# Altium PCB Trackpad.PcbDoc (part 1 of 3)
Units mm, origin at the board's own origin, x right, y up, seen from the top; angles counter-clockwise.
Board outline 170 x 125 mm, 6 copper layers (Top Layer, Inner 1, Inner 2, Inner 3, Inner 4, Bottom Layer), stack 1.58 mm thick; 124 components, 120 nets, 488 pads, 1566 vias.
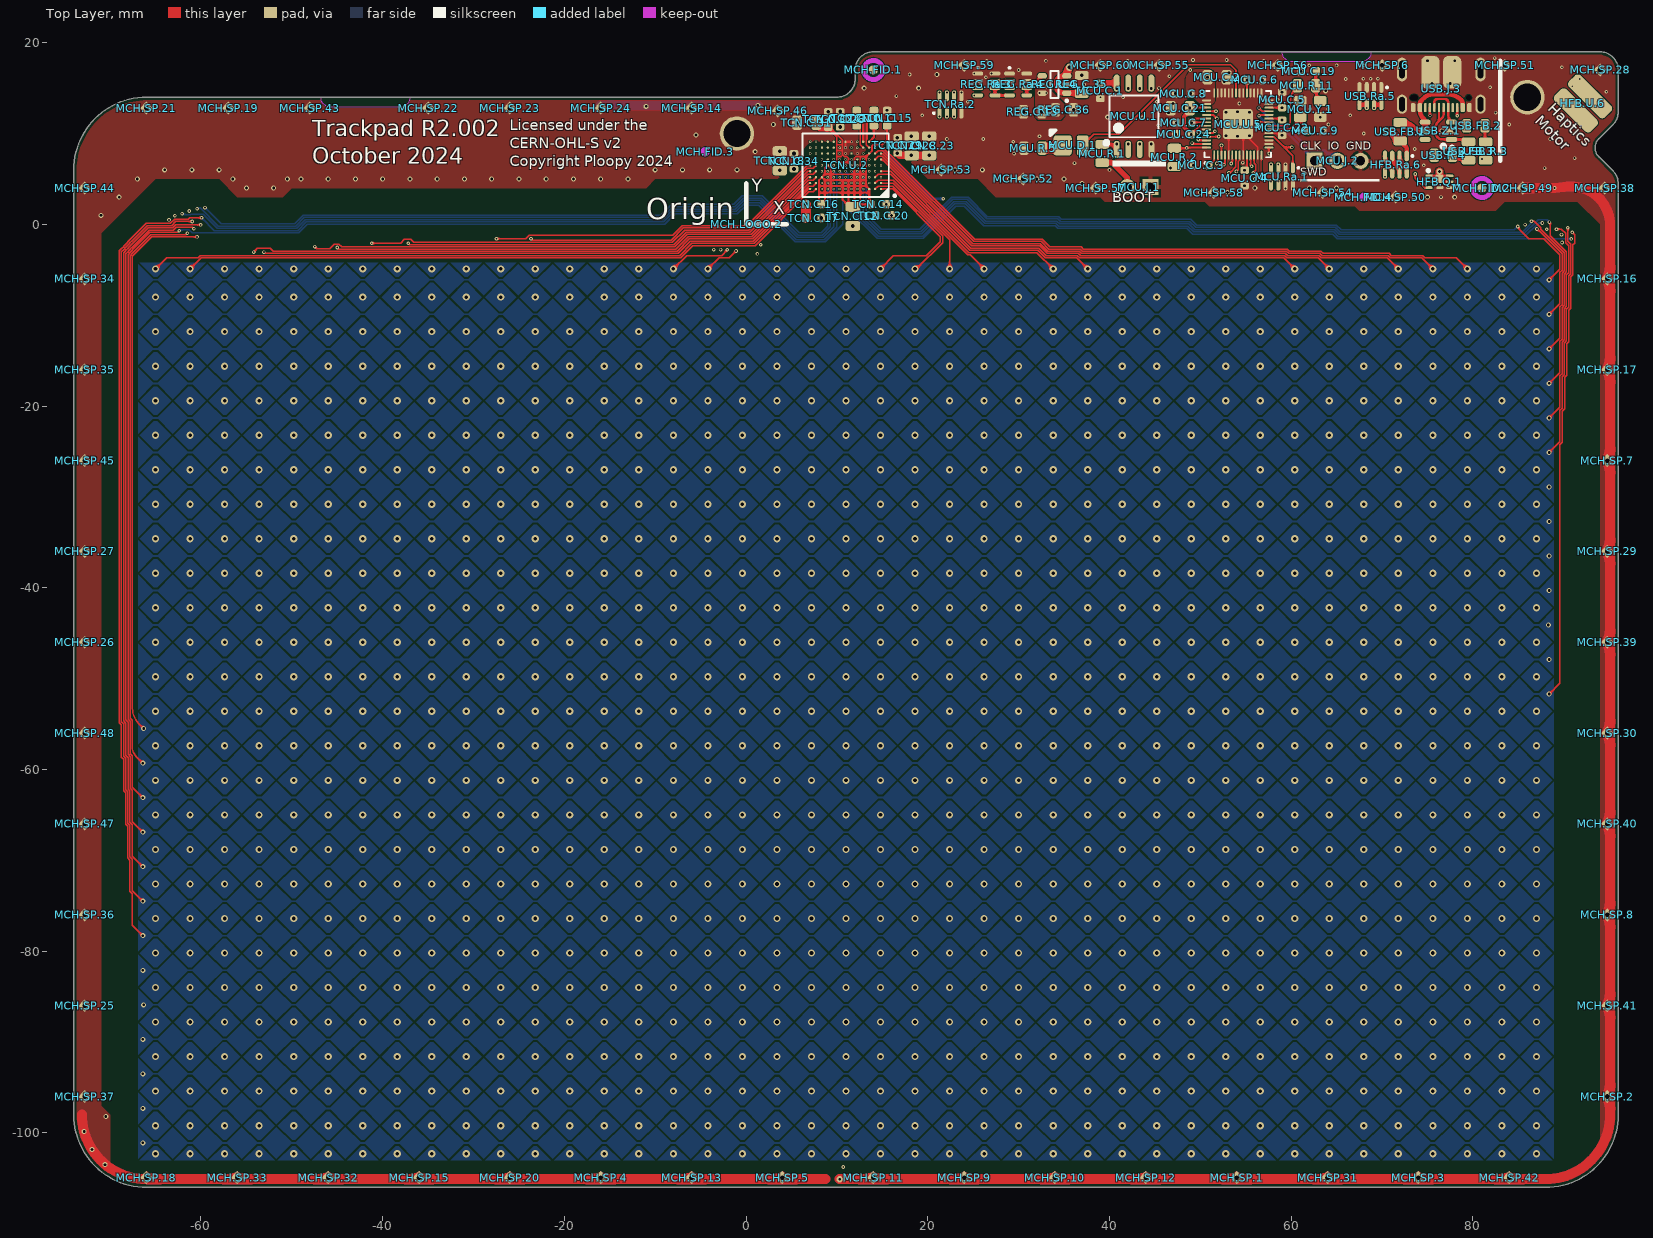
[diagram p0: Top Layer view]
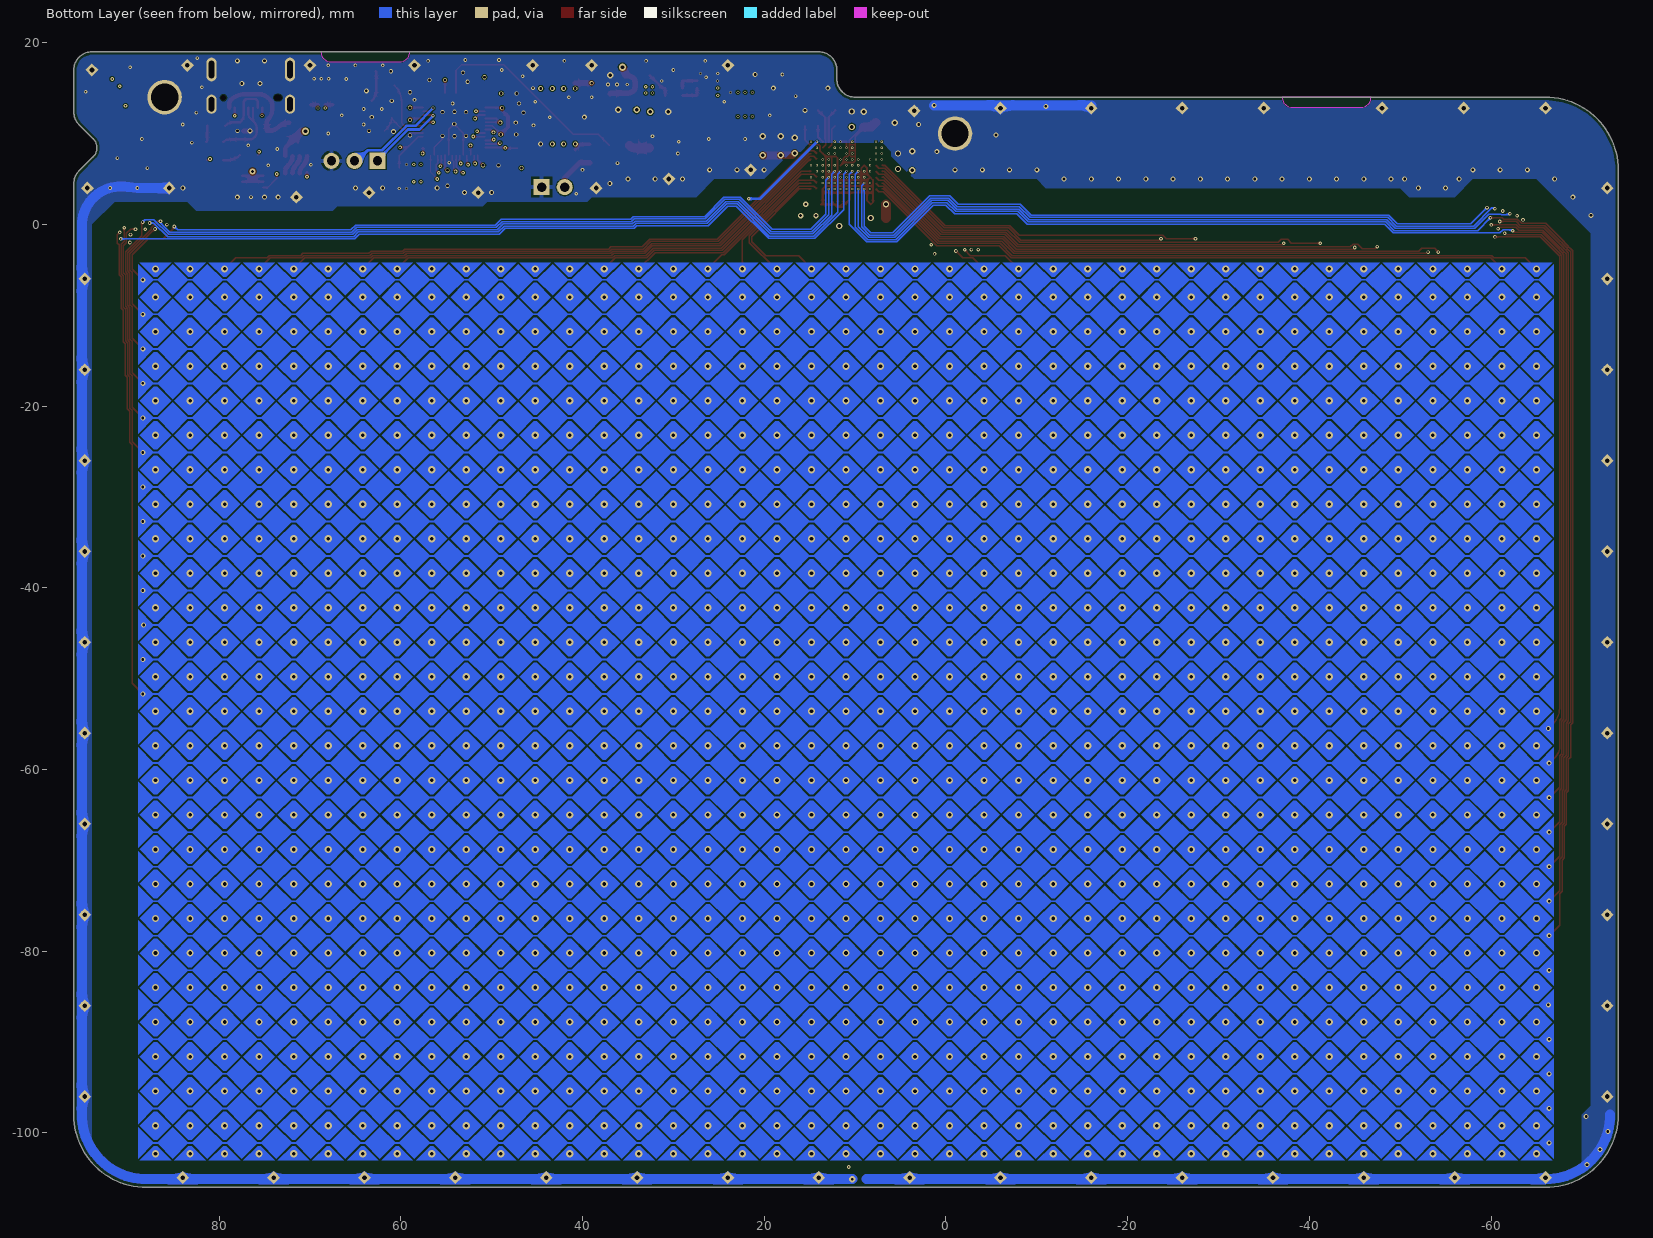
[diagram p1: Bottom Layer view, seen from below]
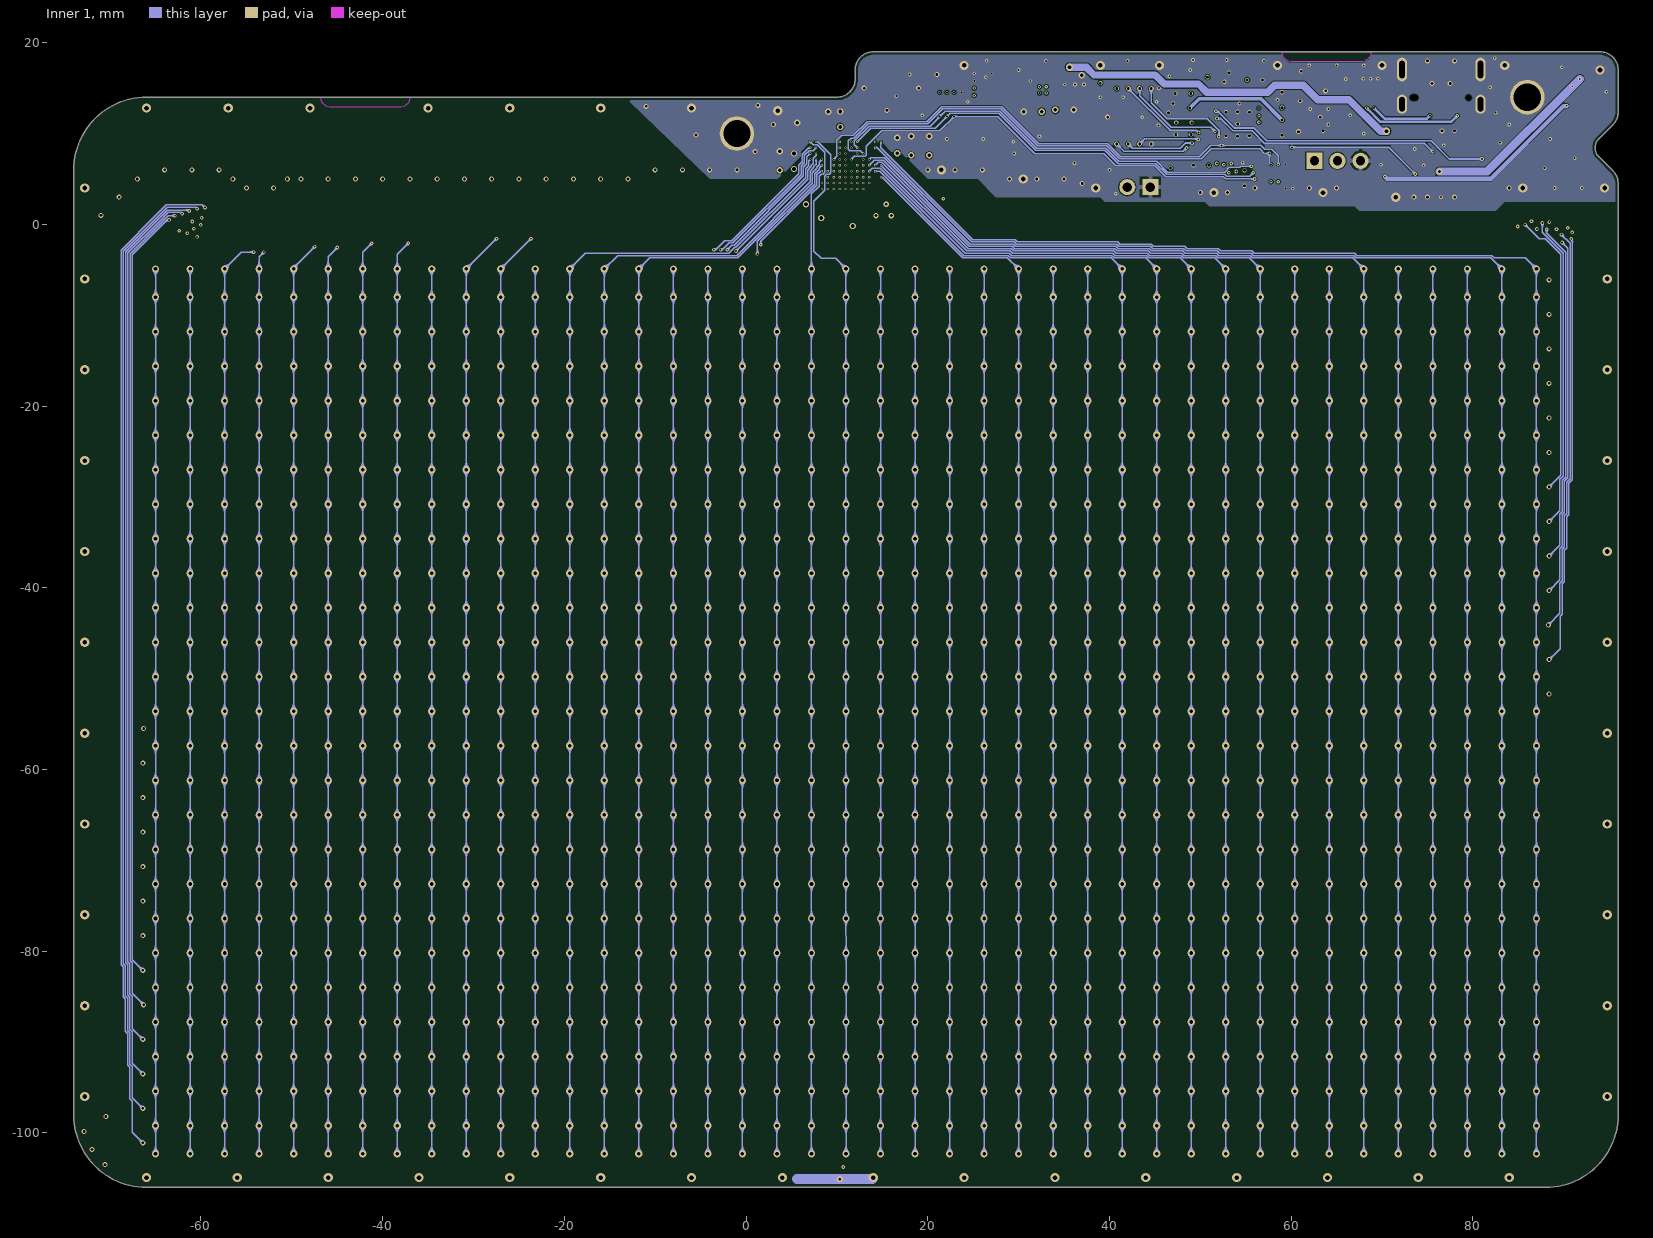
[diagram p2: Inner 1]
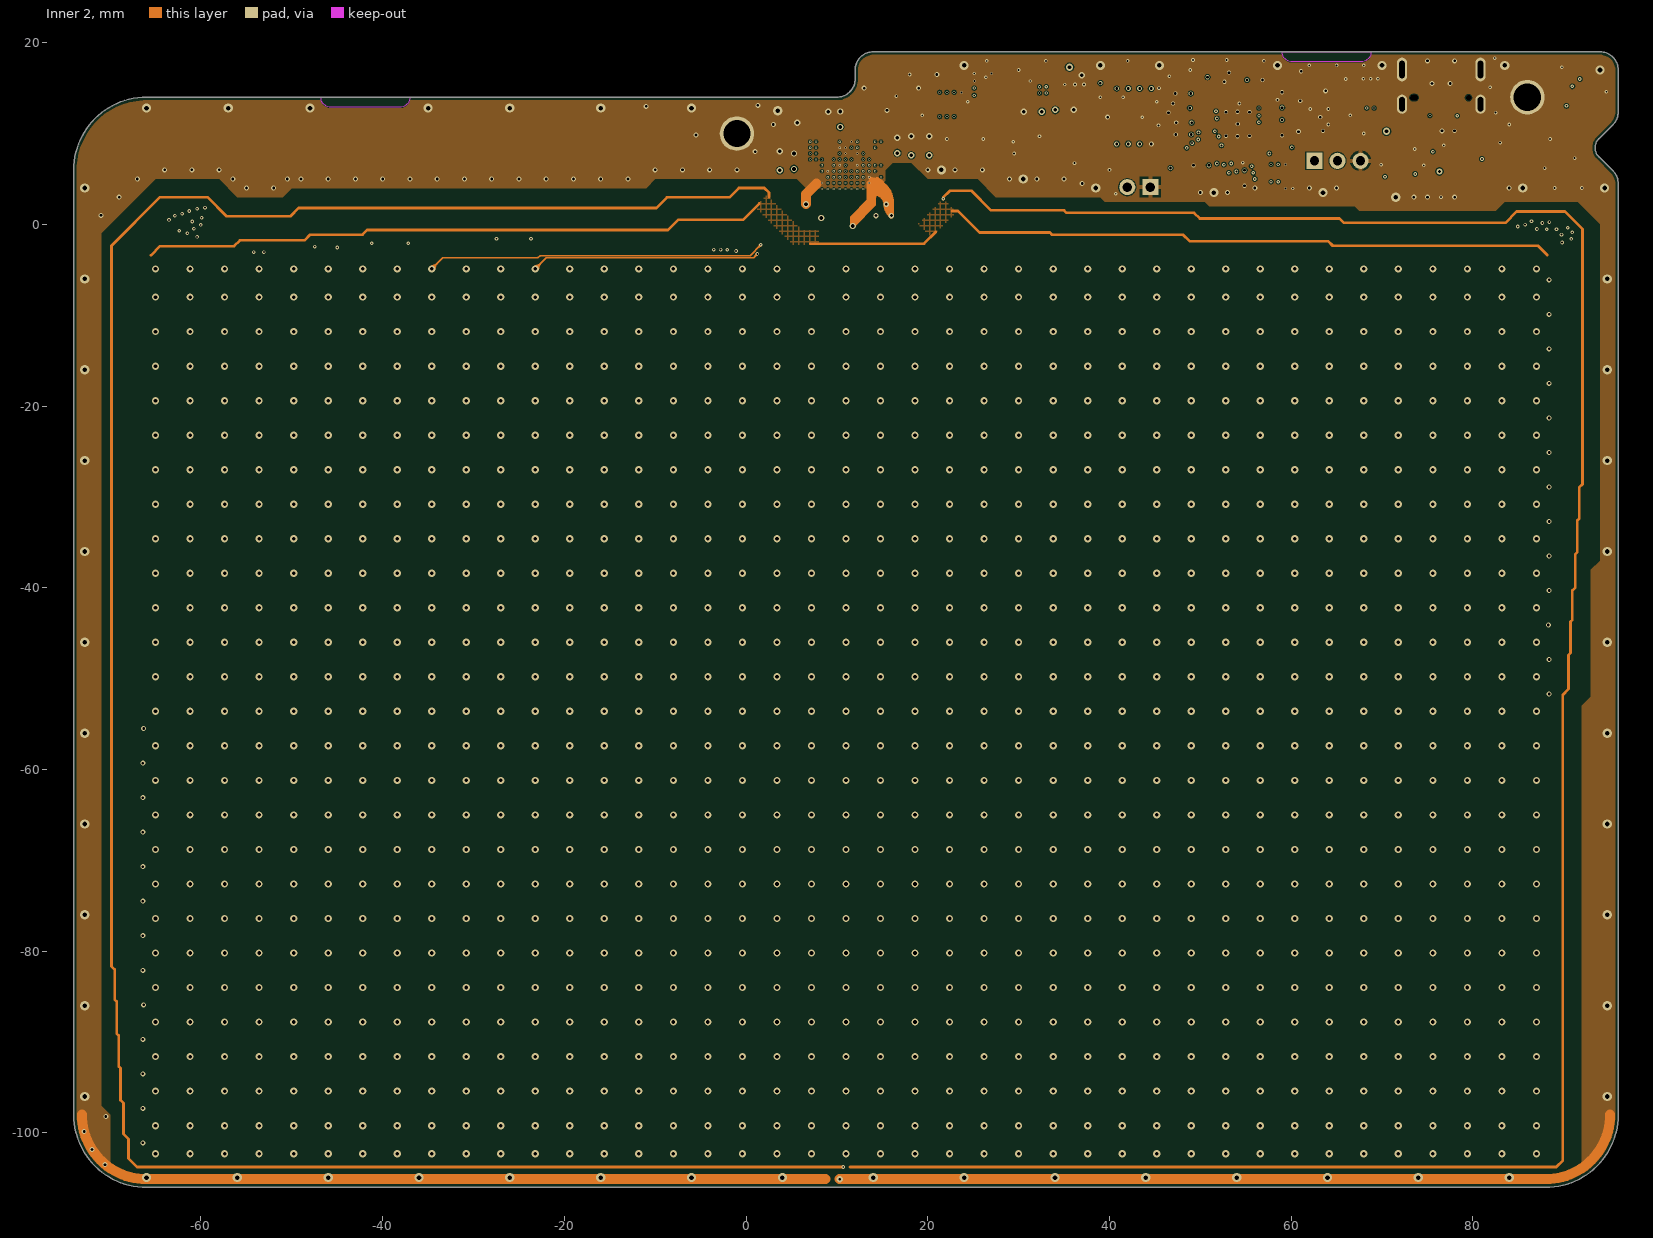
[diagram p3: Inner 2]
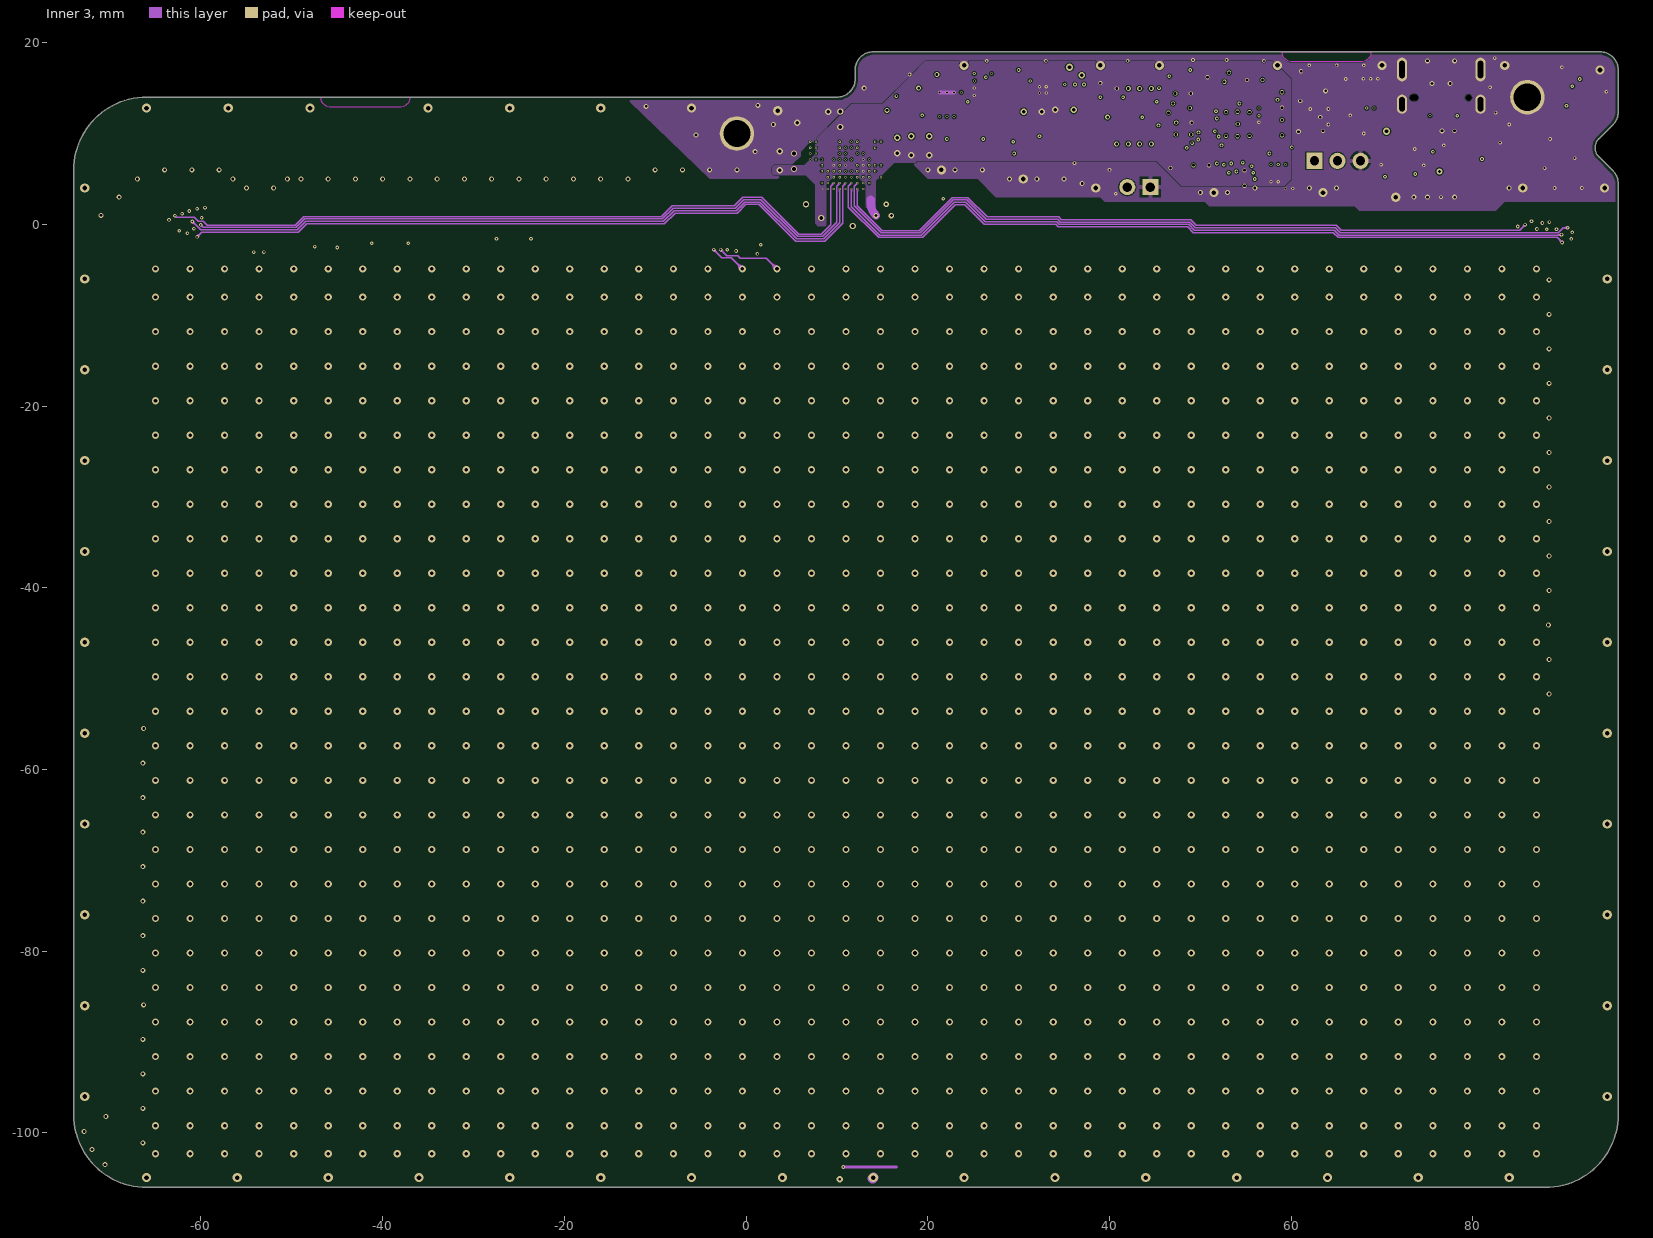
[diagram p4: Inner 3]
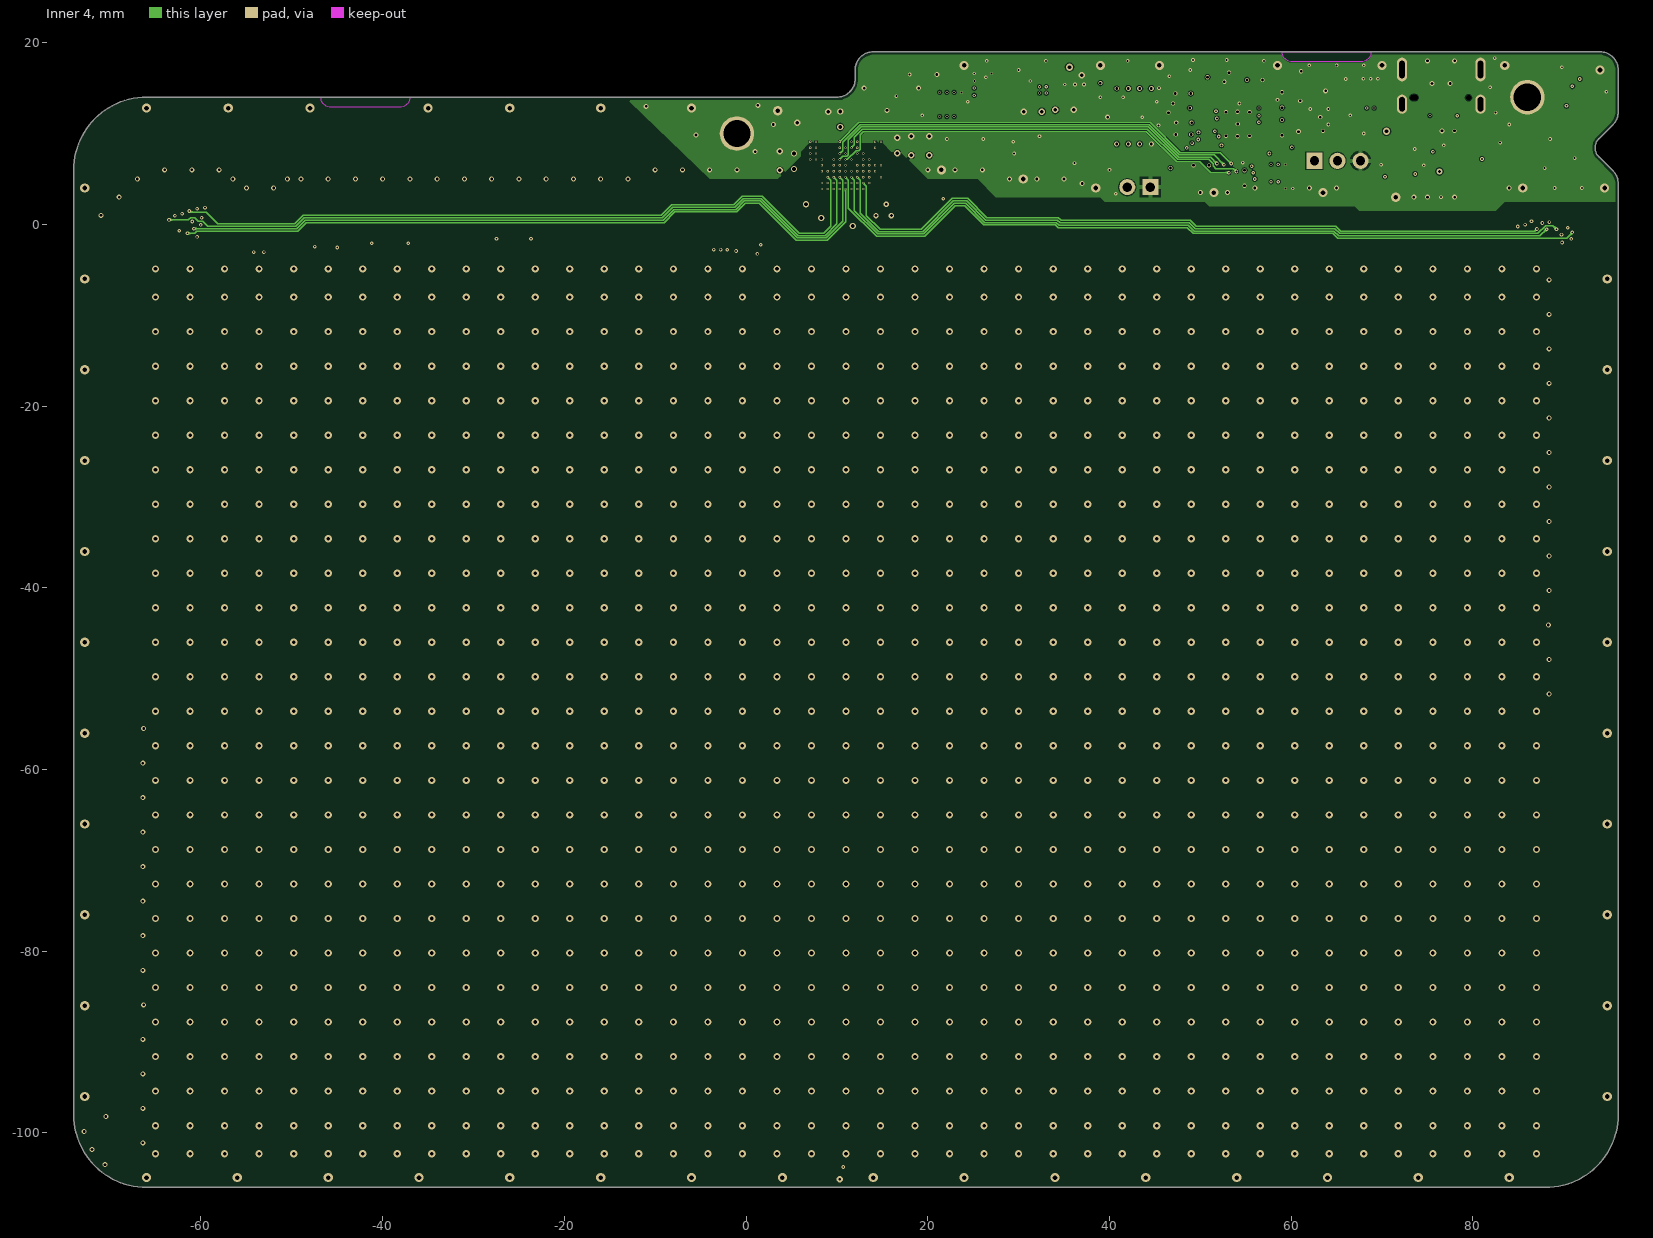
[diagram p5: Inner 4]

## Layer stack, top to bottom
Top Mask: solder mask 0.01, Solder Resist, Dk 3.5
Top Layer: signal copper 0.036
Dielectric 1: prepreg 0.2, FR-4, Dk 4.2
Inner 1: signal copper 0.0175
Dielectric 3: prepreg 0.2, PP-006, Dk 4.1
Inner 2: signal copper 0.0175
Dielectric 4: core 0.638, Dk 4.2
Inner 3: signal copper 0.0175
Dielectric 5: prepreg 0.2, PP-006, Dk 4.1
Inner 4: signal copper 0.0175
Dielectric 2: prepreg 0.2, Dk 4.2
Bottom Layer: signal copper 0.036
Bottom Solder: solder mask 0.01, Solder Resist, Dk 3.5

## Board outline
-74,-98 ccw(c-66,-98) -66,-106 88,-106 ccw(c88,-98) 96,-98 96,4.485 ccw(c94,4.485) 95.414,5.899 93.869,7.444 cw(c94.859,8.434) 93.869,9.424 95.414,10.969 ccw(c94,12.384) 96,12.384 96,17 ccw(c94,17) 94,19 14,19 ccw(c14,17) 12,17 12,16 cw(c10,16) 10,14 -66,14 ccw(c-66,6) -74,6

## Design rules (kind name [scope] priority, off if disabled: settings)
BoardOutlineClearance [(Not HasFootprint('SPARKGAP'))] p1: gap=0.34 ignorepadtopadclearanceinfootprint=FALSE
Clearance Inter-Pad [IsPad vs IsPad] p1: gap=0.1 ignorepadtopadclearanceinfootprint=FALSE
Clearance "Spark Gaps" [InNetClass('Spark Gap') vs InNet('GND') And InPoly] p2: gap=0.6 ignorepadtopadclearanceinfootprint=FALSE
Clearance FIDs [Name like 'FID*'] p3: gap=0.4 ignorepadtopadclearanceinfootprint=FALSE
Clearance "Inner Planes" [InPoly AND OnMid] p4: gap=0.1 ignorepadtopadclearanceinfootprint=FALSE // Defines a larger clearance for planes on inner layers.
Clearance "All Planes" [InPoly] p5: gap=0.1 ignorepadtopadclearanceinfootprint=FALSE // Defines minimum clearance between planes on the same layer.
Clearance "Inner Layer Clearance" [OnMid vs OnMid] p6: gap=0.1 ignorepadtopadclearanceinfootprint=FALSE // We will give inner layers more spacing because they tend to be subject to stricter process limits.
Clearance [All] p7: gap=0.09 ignorepadtopadclearanceinfootprint=FALSE
ComponentClearance "FET/TP self Clearance" [(Name like 'Q*') Or (Name like 'TP*') vs (Name like 'Q*') Or (Name like 'TP*')] p1: gap=0.254 collisioncheckmode=3 verticalgap=0.254 showdistances=FALSE
ComponentClearance [Not ((Name like 'H*') Or (Name like 'FID*') Or (Name like 'SP*')) vs Not ((Name like 'H*') Or (Name like 'FID*') Or (Name like 'SP*'))] p2: gap=0.3 collisioncheckmode=3 verticalgap=0.5 showdistances=FALSE
DiffPairsRouting [All] p1: maxlimit=0.508 minlimit=0.279 mostfreqgap=0.381 toplayer_prefgap=0.279 toplayer_minwidth=0.279 toplayer_maxwidth=0.508 toplayer_prefwidth=0.381 midlayer1_mingap=0.305 midlayer1_minwidth=0.305 midlayer1_maxwidth=0.508 midlayer1_prefwidth=0.381 midlayer2_mingap=0.305 midlayer2_minwidth=0.305 midlayer2_maxwidth=0.508 midlayer2_prefwidth=0.381 midlayer3_prefgap=0.279 midlayer3_minwidth=0.279 midlayer3_maxwidth=0.508 midlayer3_prefwidth=0.381 midlayer4_prefgap=0.279 midlayer4_minwidth=0.279 midlayer4_maxwidth=0.508 midlayer4_prefwidth=0.381 bottomlayer_prefgap=0.279 bottomlayer_minwidth=0.279 bottomlayer_maxwidth=0.508 bottomlayer_prefwidth=0.381 substack1={D919DD2D-F60F-4B9F-B5AE-F3E69D6E268F} toplayer_{d919dd2d-f60f-4b9f-b5ae-f3e69d6e268f}_minwidth=0.381 toplayer_{d919dd2d-f60f-4b9f-b5ae-f3e69d6e268f}_maxwidth=0.381 toplayer_{d919dd2d-f60f-4b9f-b5ae-f3e69d6e268f}_prefwidth=0.381 midlayer1_{d919dd2d-f60f-4b9f-b5ae-f3e69d6e268f}_minwidth=0.381 midlayer1_{d919dd2d-f60f-4b9f-b5ae-f3e69d6e268f}_maxwidth=0.381 midlayer1_{d919dd2d-f60f-4b9f-b5ae-f3e69d6e268f}_prefwidth=0.381 midlayer2_{d919dd2d-f60f-4b9f-b5ae-f3e69d6e268f}_minwidth=0.381 midlayer2_{d919dd2d-f60f-4b9f-b5ae-f3e69d6e268f}_maxwidth=0.381 midlayer2_{d919dd2d-f60f-4b9f-b5ae-f3e69d6e268f}_prefwidth=0.381 midlayer3_{d919dd2d-f60f-4b9f-b5ae-f3e69d6e268f}_minwidth=0.381 midlayer3_{d919dd2d-f60f-4b9f-b5ae-f3e69d6e268f}_maxwidth=0.381 midlayer3_{d919dd2d-f60f-4b9f-b5ae-f3e69d6e268f}_prefwidth=0.381 midlayer4_{d919dd2d-f60f-4b9f-b5ae-f3e69d6e268f}_minwidth=0.381 midlayer4_{d919dd2d-f60f-4b9f-b5ae-f3e69d6e268f}_maxwidth=0.381 midlayer4_{d919dd2d-f60f-4b9f-b5ae-f3e69d6e268f}_prefwidth=0.381 bottomlayer_{d919dd2d-f60f-4b9f-b5ae-f3e69d6e268f}_minwidth=0.381 bottomlayer_{d919dd2d-f60f-4b9f-b5ae-f3e69d6e268f}_maxwidth=0.381 bottomlayer_{d919dd2d-f60f-4b9f-b5ae-f3e69d6e268f}_prefwidth=0.381 maxuncoupledlength=12.7
Height [All] p1: minheight=0 maxheight=13 prefheight=4
HoleSize [All] p1: absolutevalues=TRUE maxlimit=100 minlimit=0.15 maxpercent=80.000 minpercent=20.000
HoleToHoleClearance [All] p1: gap=0.49 allowstackedmicrovias=TRUE
LayerPairs [All] p1: enforce=FALSE
MinimumAnnularRing [All] p1: minimumring=0.049
MinimumSolderMaskSliver [All] p1: minsoldermaskwidth=0.1
NetAntennae [Not (HasFootprint('BALANCE_RESISTOR'))] p1: netantennaetolerance=1
PasteMaskExpansion [All] p1: expansion=-0.02
PlaneClearance [All] p1: clearance=0.12
PlaneConnect [All] p1: pad.planeconnectstyle=Relief pad.reliefexpansion=0.5 pad.reliefentries=4 pad.reliefconductorwidth=0.5 pad.reliefairgap=0.25 via.planeconnectstyle=Direct via.reliefexpansion=0.5 via.reliefentries=4 via.reliefconductorwidth=0.5 via.reliefairgap=0.25
PolygonConnect "PolygonConnect Spark Gap" [HasFootprint('SparkGap')] p1: connectstyle=Direct reliefconductorwidth=0.254 reliefentries=4 polygonreliefangle="90 Angle" airgapwidth=0.254 // This rule makes it so spark gaps get direct connections to ground planes.
PolygonConnect PolygonConnect_GND [All vs InNet('GND')] p2: connectstyle=Direct reliefconductorwidth=0.5 reliefentries=4 polygonreliefangle="90 Angle" airgapwidth=0.25 // This rule specifies all vias and holes connected to a GND plane have direct connections.
PolygonConnect [All] p3: connectstyle=Direct reliefconductorwidth=0.5 reliefentries=4 polygonreliefangle="90 Angle" airgapwidth=0.25
RoutingCorners [All] p1: cornerstyle=45-Degree minsetback=1 maxsetback=4
RoutingVias [All] p1: holewidth=0.5 width=1 viastyle="Through Hole" minholewidth=0.15 minwidth=0.25 maxholewidth=6.3 maxwidth=8
ShortCircuit [Not (InPadClass('TraceResistorPads')) vs Not (InPadClass('TraceResistorPads'))] p1: allowed=FALSE
SilkToBoardRegionClearance [All] p1 off:
SilkToSilkClearance [All] p1: silktosilkclearance=0
SilkToSolderMaskClearance SilkscreenOverComponentPads [IsPad] p1: minsilkscreentomaskgap=0.15 clearancetoexposedcopper=FALSE
SolderMaskExpansion SolderMaskExpansion_via [IsVia] p1: expansion=0.102 istentingtop=TRUE
SolderMaskExpansion [All] p2: expansion=0.04 istentingtop=FALSE
Width [All] p1: maxlimit=50.8 minlimit=0.1 preferedwidth=0.4 midlayer1_minwidth=0.12 midlayer2_minwidth=0.12 midlayer3_minwidth=0.12 midlayer4_minwidth=0.12 substack1={D919DD2D-F60F-4B9F-B5AE-F3E69D6E268F} toplayer_{d919dd2d-f60f-4b9f-b5ae-f3e69d6e268f}_minwidth=0.26 midlayer1_{d919dd2d-f60f-4b9f-b5ae-f3e69d6e268f}_minwidth=0.254 midlayer1_{d919dd2d-f60f-4b9f-b5ae-f3e69d6e268f}_maxwidth=0.254 midlayer1_{d919dd2d-f60f-4b9f-b5ae-f3e69d6e268f}_prefwidth=0.254 midlayer2_{d919dd2d-f60f-4b9f-b5ae-f3e69d6e268f}_minwidth=0.35 midlayer3_{d919dd2d-f60f-4b9f-b5ae-f3e69d6e268f}_minwidth=0.35 midlayer4_{d919dd2d-f60f-4b9f-b5ae-f3e69d6e268f}_minwidth=0.254 midlayer4_{d919dd2d-f60f-4b9f-b5ae-f3e69d6e268f}_maxwidth=0.254 midlayer4_{d919dd2d-f60f-4b9f-b5ae-f3e69d6e268f}_prefwidth=0.254 bottomlayer_{d919dd2d-f60f-4b9f-b5ae-f3e69d6e268f}_minwidth=0.26 minimp=50.000000 maximp=50.000000 favimp=50.000000
14 further rules are at their usual default settings.

## Classes and differential pairs
component class HFB: HFB.Q.1 HFB.Ra.6 HFB.U.6
component class TCN: TCN.C.10 TCN.C.11 TCN.C.12 TCN.C.14 TCN.C.15 TCN.C.16 TCN.C.17 TCN.C.18 TCN.C.20 TCN.C.23 TCN.C.26 TCN.C.28 TCN.C.29 TCN.C.31 TCN.C.32 TCN.C.34 TCN.Ra.2 TCN.U.2
component class USB: USB.FB.1 USB.FB.2 USB.FB.3 USB.J.3 USB.R.3 USB.R.4 USB.Ra.5 USB.Z.1
component class REG: REG.C.13 REG.C.35 REG.C.36 REG.Ra.3 REG.Ra.4 REG.U.4
component class MCU: MCU.C.1 MCU.C.2 MCU.C.3 MCU.C.4 MCU.C.5 MCU.C.6 MCU.C.7 MCU.C.8 MCU.C.9 MCU.C.19 MCU.C.21 MCU.C.22 MCU.C.24 MCU.D.1 MCU.J.1 MCU.J.2 MCU.R.1 MCU.R.2 MCU.R.5 MCU.R.11 MCU.Ra.1 MCU.U.1 MCU.U.5 MCU.Y.1
component class MCH: MCH.FID.1 MCH.FID.2 MCH.FID.3 MCH.FID.4 MCH.LOGO.2 MCH.SP.1 MCH.SP.2 MCH.SP.3 MCH.SP.4 MCH.SP.5 MCH.SP.6 MCH.SP.7 MCH.SP.8 MCH.SP.9 MCH.SP.10 MCH.SP.11 MCH.SP.12 MCH.SP.13 MCH.SP.14 MCH.SP.15 MCH.SP.16 MCH.SP.17 MCH.SP.18 MCH.SP.19 MCH.SP.20 MCH.SP.21 MCH.SP.22 MCH.SP.23 MCH.SP.24 MCH.SP.25 MCH.SP.26 MCH.SP.27 MCH.SP.28 MCH.SP.29 MCH.SP.30 MCH.SP.31 MCH.SP.32 MCH.SP.33 MCH.SP.34 MCH.SP.35 MCH.SP.36 MCH.SP.37 MCH.SP.38 MCH.SP.39 MCH.SP.40 MCH.SP.41 MCH.SP.42 MCH.SP.43 MCH.SP.44 MCH.SP.45 MCH.SP.46 MCH.SP.47 MCH.SP.48 MCH.SP.49 MCH.SP.50 MCH.SP.51 MCH.SP.52 MCH.SP.53 MCH.SP.54 MCH.SP.55 MCH.SP.56 MCH.SP.57 MCH.SP.58 MCH.SP.59 MCH.SP.60

## Components (designator, comment, footprint, x,y, rotation, side; value= is the part's Value field where it differs from the comment)
HFB.Q.1 "CSD16301Q2" "CSD16301Q2 - SON65P200X80_HS-7M" 76.325,4.7 r0 top (schematic designator Q1)
HFB.Ra.6 "1206 Quad" "4x 1R 5% - CAC-80P320X160-8M" 71.525,6.575 r270 top value="1R 5%" (schematic designator Ra6)
HFB.U.6 "MOTOR-VIBRATORY" MOTOR-VIBRATORY 93.961,11.908 r135 top (schematic designator U6)
MCH.FID.1 "IPC-7351 Fiducial 1mm" FIDUCIAL_1.5 14,17 r90 top (schematic designator FID1)
MCH.FID.2 "IPC-7351 Fiducial 1mm" FIDUCIAL_1.5 81,4 r90 top (schematic designator FID2)
MCH.FID.3 "1mm Fiducial for OpenPNP" FIDUCIAL-NEW -4.5,8 r90 top (schematic designator FID3)
MCH.FID.4 "1mm Fiducial for OpenPNP" FIDUCIAL-NEW 68,3 r90 top (schematic designator FID4)
MCH.LOGO.2 "Coordinate system marker for assembly" "Coordinate System" 0,0 r0 top (schematic designator LOGO2)
MCH.SP.1 "Spark Gap" SparkGap 54,-104.925 r90 top (schematic designator SP1)
MCH.SP.2 "Spark Gap" SparkGap 94.8,-96 r90 top (schematic designator SP2)
MCH.SP.3 "Spark Gap" SparkGap 74,-104.925 r90 top (schematic designator SP3)
MCH.SP.4 "Spark Gap" SparkGap -16,-104.925 r90 top (schematic designator SP4)
MCH.SP.5 "Spark Gap" SparkGap 4,-104.925 r90 top (schematic designator SP5)
MCH.SP.6 "Spark Gap" SparkGap 70,17.5 r90 top (schematic designator SP6)
MCH.SP.7 "Spark Gap" SparkGap 94.8,-26 r90 top (schematic designator SP7)
MCH.SP.8 "Spark Gap" SparkGap 94.8,-76 r90 top (schematic designator SP8)
MCH.SP.9 "Spark Gap" SparkGap 24,-104.925 r90 top (schematic designator SP9)
MCH.SP.10 "Spark Gap" SparkGap 34,-104.925 r90 top (schematic designator SP10)
MCH.SP.11 "Spark Gap" SparkGap 14,-104.925 r90 top (schematic designator SP11)
MCH.SP.12 "Spark Gap" SparkGap 44,-104.925 r90 top (schematic designator SP12)
MCH.SP.13 "Spark Gap" SparkGap -6,-104.925 r90 top (schematic designator SP13)
MCH.SP.14 "Spark Gap" SparkGap -6,12.8 r90 top (schematic designator SP14)
MCH.SP.15 "Spark Gap" SparkGap -36,-104.925 r90 top (schematic designator SP15)
MCH.SP.16 "Spark Gap" SparkGap 94.8,-6 r90 top (schematic designator SP16)
MCH.SP.17 "Spark Gap" SparkGap 94.8,-16 r90 top (schematic designator SP17)
MCH.SP.18 "Spark Gap" SparkGap -66,-104.925 r90 top (schematic designator SP18)
MCH.SP.19 "Spark Gap" SparkGap -57,12.8 r90 top (schematic designator SP19)
MCH.SP.20 "Spark Gap" SparkGap -26,-104.925 r90 top (schematic designator SP20)
MCH.SP.21 "Spark Gap" SparkGap -66,12.8 r90 top (schematic designator SP21)
MCH.SP.22 "Spark Gap" SparkGap -35,12.8 r90 top (schematic designator SP22)
MCH.SP.23 "Spark Gap" SparkGap -26,12.8 r90 top (schematic designator SP23)
MCH.SP.24 "Spark Gap" SparkGap -16,12.8 r90 top (schematic designator SP24)
MCH.SP.25 "Spark Gap" SparkGap -72.8,-86 r90 top (schematic designator SP25)
MCH.SP.26 "Spark Gap" SparkGap -72.8,-46 r90 top (schematic designator SP26)
MCH.SP.27 "Spark Gap" SparkGap -72.8,-36 r90 top (schematic designator SP27)
MCH.SP.28 "Spark Gap" SparkGap 94,17 r90 top (schematic designator SP28)
MCH.SP.29 "Spark Gap" SparkGap 94.8,-36 r90 top (schematic designator SP29)
MCH.SP.30 "Spark Gap" SparkGap 94.8,-56 r90 top (schematic designator SP30)
MCH.SP.31 "Spark Gap" SparkGap 64,-104.925 r90 top (schematic designator SP31)
MCH.SP.32 "Spark Gap" SparkGap -46,-104.925 r90 top (schematic designator SP32)
MCH.SP.33 "Spark Gap" SparkGap -56,-104.925 r90 top (schematic designator SP33)
MCH.SP.34 "Spark Gap" SparkGap -72.8,-6 r90 top (schematic designator SP34)
MCH.SP.35 "Spark Gap" SparkGap -72.8,-16 r90 top (schematic designator SP35)
MCH.SP.36 "Spark Gap" SparkGap -72.8,-76 r90 top (schematic designator SP36)
MCH.SP.37 "Spark Gap" SparkGap -72.8,-96 r90 top (schematic designator SP37)
MCH.SP.38 "Spark Gap" SparkGap 94.5,4 r90 top (schematic designator SP38)
MCH.SP.39 "Spark Gap" SparkGap 94.8,-46 r90 top (schematic designator SP39)
MCH.SP.40 "Spark Gap" SparkGap 94.8,-66 r90 top (schematic designator SP40)
MCH.SP.41 "Spark Gap" SparkGap 94.8,-86 r90 top (schematic designator SP41)
MCH.SP.42 "Spark Gap" SparkGap 84,-104.925 r90 top (schematic designator SP42)
MCH.SP.43 "Spark Gap" SparkGap -48,12.8 r90 top (schematic designator SP43)
MCH.SP.44 "Spark Gap" SparkGap -72.8,4 r90 top (schematic designator SP44)
MCH.SP.45 "Spark Gap" SparkGap -72.8,-26 r90 top (schematic designator SP45)
MCH.SP.46 "Spark Gap" SparkGap 3.5,12.5 r90 top (schematic designator SP46)
MCH.SP.47 "Spark Gap" SparkGap -72.8,-66 r90 top (schematic designator SP47)
MCH.SP.48 "Spark Gap" SparkGap -72.8,-56 r90 top (schematic designator SP48)
MCH.SP.49 "Spark Gap" SparkGap 85.5,4 r90 top (schematic designator SP49)
MCH.SP.50 "Spark Gap" SparkGap 71.5,3 r90 top (schematic designator SP50)
MCH.SP.51 "Spark Gap" SparkGap 83.5,17.5 r90 top (schematic designator SP51)
MCH.SP.52 "Spark Gap" SparkGap 30.5,5 r90 top (schematic designator SP52)
MCH.SP.53 "Spark Gap" SparkGap 21.5,6 r90 top (schematic designator SP53)
MCH.SP.54 "Spark Gap" SparkGap 63.5,3.5 r90 top (schematic designator SP54)
MCH.SP.55 "Spark Gap" SparkGap 45.5,17.5 r90 top (schematic designator SP55)
MCH.SP.56 "Spark Gap" SparkGap 58.5,17.5 r90 top (schematic designator SP56)
MCH.SP.57 "Spark Gap" SparkGap 38.5,4 r90 top (schematic designator SP57)
MCH.SP.58 "Spark Gap" SparkGap 51.5,3.5 r90 top (schematic designator SP58)
MCH.SP.59 "Spark Gap" SparkGap 24,17.5 r90 top (schematic designator SP59)
MCH.SP.60 "Spark Gap" SparkGap 39,17.5 r90 top (schematic designator SP60)
MCU.C.1 "0603 X5R" "0603 CAPACITOR - CAPC1608X06N" 39,14.7 r0 top value="0.1uF 25V" (schematic designator C1)
MCU.C.2 "0805 X5R" "0805 - TALL" 51.85,16.2 r270 top value="1uF 25V" (schematic designator C2)
MCU.C.3 "0603 X5R" "0603 CAPACITOR - CAPC1608X06N" 50.1,6.5 r270 top value="0.1uF 25V" (schematic designator C3)
MCU.C.4 "0603 X5R" "0603 CAPACITOR - CAPC1608X06N" 54.875,5.1 r0 top value="0.1uF 25V" (schematic designator C4)
MCU.C.5 "0603 X5R" "0603 CAPACITOR - CAPC1608X06N" 59,13.7 r180 top value="0.1uF 25V" (schematic designator C5)
MCU.C.6 "0603 X5R" "0603 CAPACITOR - CAPC1608X06N" 56,15.9 r90 top value="0.1uF 25V" (schematic designator C6)
MCU.C.7 "0603 X5R" "0603 CAPACITOR - CAPC1608X06N" 48.2,11.2 r270 top value="0.1uF 25V" (schematic designator C7)
MCU.C.8 "0603 X5R" "0603 CAPACITOR - CAPC1608X06N" 48.1,14.4 r270 top value="0.1uF 25V" (schematic designator C8)
MCU.C.9 "0603" "0603 capacitor - CAPC1608X06N" 62.65,10.3 r270 top value="18pF 50V" (schematic designator C9)
MCU.C.19 "0603" "0603 capacitor - CAPC1608X06N" 61.925,16.85 r270 top value="18pF 50V" (schematic designator C19)
MCU.C.21 "0805 X5R" "0805 - TALL" 47.8,12.8 r90 top value="1uF 25V" (schematic designator C21)
MCU.C.22 "0603 X5R" "0603 CAPACITOR - CAPC1608X06N" 59,10.65 r0 top value="0.1uF 25V" (schematic designator C22)
MCU.C.24 "0603 X5R" "0603 CAPACITOR - CAPC1608X06N" 48.15,9.9 r270 top value="0.1uF 25V" (schematic designator C24)
MCU.D.1 "SPMWH1228" SPMWH1228 35.8,8.7 r180 top (schematic designator D1)
MCU.J.1 "HEADER2" 2x1 44.5,4.1 r270 top (schematic designator J1)
MCU.J.2 "HEADER3" 3x1 62.56,7 r90 top (schematic designator J2)
MCU.R.1 "0805" 0805 39.2,7.8 r180 top value="1k 1%" (schematic designator R1)
MCU.R.2 "0805" 0805 47.15,7.375 r180 top value="10k 1%" (schematic designator R2)
MCU.R.5 "0805" 0805 31.6,8.4 r90 top value="100R 1%" (schematic designator R5)
MCU.R.11 "0805" 0805 61.7,15.275 r90 top value="1k 1%" (schematic designator R11)
MCU.Ra.1 "1206 Quad" "4x 10k 1% - CAC-80P320X160-8M" 58.985,5.269 r270 top value="10k 1%" (schematic designator Ra1)
MCU.U.1 "W25Q16JVSSIQ" "W25Q128JVS - SOIC127P790X216-8M" 42.7,11.9 r90 top (schematic designator U1)
MCU.U.5 "RP2040" "RP2040 - QFN40P700X700X90_HS-57M" 54.125,11.05 r90 top (schematic designator U5)
MCU.Y.1 "RH100-12.000-16-3030" RH100-12.000-16-3030 62.1,12.7 r0 top (schematic designator Y1)
REG.C.13 "0805" 0805 31.55,12.4 r90 top value="10uF 25V" (schematic designator C13)
REG.C.35 "0805" 0805 36.95,15.4 r0 top value="1uF 25V" (schematic designator C35)
REG.C.36 "0805" 0805 35.05,12.6 r270 top value="1uF 25V" (schematic designator C36)
REG.Ra.3 "1206 Quad" "4x 10k 1% - CAC-80P320X160-8M" 26.45,15.4 r0 top value="10k 1%" (schematic designator Ra3)
REG.Ra.4 "1206 Quad" "4x 1k 1% - CAC-80P320X160-8M" 29.95,15.4 r0 top value="1k 1%" (schematic designator Ra4)
REG.U.4 "AP7330-W5" "AP7330-W5 - SOT95P270X145-5N" 33.95,15.4 r180 top (schematic designator U4)
TCN.C.10 "0603 X5R" "0603 CAPACITOR - CAPC1608X06N" 12.175,11.7 r180 top value="0.01uF 25V" (schematic designator C10)
TCN.C.11 "0603 X5R" "0603 CAPACITOR - CAPC1608X06N" 14.075,11.7 r180 top value="0.01uF 25V" (schematic designator C11)
TCN.C.12 "0805 X5R" "0805 - TALL" 11.75,0.875 r180 top value="10uF 25V" (schematic designator C12)
TCN.C.14 "0603 X5R" "0603 CAPACITOR - CAPC1608X06N" 14.575,2.2 r90 top value="0.1uF 25V" (schematic designator C14)
TCN.C.15 "0603 X5R" "0603 CAPACITOR - CAPC1608X06N" 15.525,11.7 r180 top value="0.1uF 25V" (schematic designator C15)
TCN.C.16 "0603 X5R" "0603 capacitor - CAPC1608X06N" 7.425,2.2 r270 top value="0.1uF 25V" (schematic designator C16)
TCN.C.17 "0603 X5R" "0603 capacitor - CAPC1608X06N" 7.425,0.7 r270 top value="0.1uF 25V" (schematic designator C17)
TCN.C.18 "0805 X5R" "0805 - TALL" 3.725,7 r0 top value="1uF 25V" (schematic designator C18)
TCN.C.20 "0603 X5R" "0603 capacitor - CAPC1608X06N" 15.15,0.975 r90 top value="0.1uF 25V" (schematic designator C20)
TCN.C.23 "0805 X5R" "0805 - TALL" 20.15,8.65 r0 top value="10uF 25V" (schematic designator C23)
TCN.C.26 "0603 X5R" "0603 CAPACITOR - CAPC1608X06N" 10.35,11.575 r180 top value="0.1uF 25V" (schematic designator C26)
TCN.C.28 "0805 X5R" "0805 - TALL" 18.225,8.65 r0 top value="1uF 25V" (schematic designator C28)
TCN.C.29 "0603 X5R" "0603 CAPACITOR - CAPC1608X06N" 16.7,8.7 r180 top value="0.1uF 25V" (schematic designator C29)
TCN.C.31 "0805 X5R" "0805 - TALL" 6.675,11.2 r90 top value="10uF 25V" (schematic designator C31)
TCN.C.32 "0603 X5R" "0603 CAPACITOR - CAPC1608X06N" 9.05,11.55 r180 top value="0.1uF 25V" (schematic designator C32)
TCN.C.34 "0603 X5R" "0603 CAPACITOR - CAPC1608X06N" 5.275,6.95 r180 top value="0.1uF 25V" (schematic designator C34)
TCN.Ra.2 "1206 Quad" "4x 1k 1% - CAC-80P320X160-8M" 22.5,13.2 r90 top value="1k 1%" (schematic designator Ra2)
TCN.U.2 "ATMXT1066TD-NHU" "ATMXT1066TD-NHU - BGA117C65P13X9_950X700X65" 10.95,6.5 r180 top locked (schematic designator U2)
USB.FB.1 "ACML-0805-601-T" 0805 72,10.2 r0 top (schematic designator FB1)
USB.FB.2 "ACML-0805-601-T" 0805 80.325,10.85 r90 top (schematic designator FB2)
USB.FB.3 "ACML-0805-601-T" 0805 79.525,8.075 r0 top (schematic designator FB3)
USB.J.3 "DX07S016JA1R1500" DX07S016JA1R1500 76.525,15.85 r180 top (schematic designator J3)
USB.R.3 "0805" 0805 81.4,8.075 r0 top value="22R 1%" (schematic designator R3)
USB.R.4 "0805" 0805 76.75,7.6 r270 top value="22R 1%" (schematic designator R4)
USB.Ra.5 "1206 Quad" "4x 10k 1% - CAC-80P320X160-8M" 68.725,14.125 r270 top value="10k 1%" (schematic designator Ra5)
USB.Z.1 "IP4220CZ6,125" "PESD3V3S4UD - SOT95P275X110-6N" 76.2,10.3 r180 top (schematic designator Z1)

## Footprints (in the part's own frame and the unit in brackets; to place one, negate y for a bottom-side part, rotate by r counter-clockwise, add the part's x,y. Pads: shape width x height; smd on the part's side, far side on the other; paste and mask are expansions set on the pad)
2x1 [mil]
  rect 70x70 hole 40 paste-3897.64: 1(0,0)
  round 70 hole 40 paste-3897.64: 2(0,-100)
  body extent -50,-150 50,50, height 339
3x1 [mil]
  rect 70x70 hole 40 paste-3897.64: 1(0,0)
  round 70 hole 40 paste-3897.64: 2(0,-100) 3(0,-200)
"4x 1k 1% - CAC-80P320X160-8M" [mm] "Chip Array, Concave, 8-Leads, Pitch 0.80mm,  Body 3.20x1.60mm,  IPC Low Density"
  oval 1.2x0.45 smd paste-99: 1(-0.95,1.2) 2(-0.95,0.4) 3(-0.95,-0.4) 4(-0.95,-1.2) 5(0.95,-1.2) 6(0.95,-0.4) 7(0.95,0.4) 8(0.95,1.2)
  silkscreen extent -1,1.78 -0.9,1.87, body extent -0.9,-1.7 0.9,1.7, height 0.6
"4x 1R 5% - CAC-80P320X160-8M" [mm] "Chip Array, Concave, 8-Leads, Pitch 0.80mm,  Body 3.20x1.60mm,  IPC Low Density"
  oval 1.2x0.45 smd paste-99: 1(-0.95,1.2) 2(-0.95,0.4) 3(-0.95,-0.4) 4(-0.95,-1.2) 5(0.95,-1.2) 6(0.95,-0.4) 7(0.95,0.4) 8(0.95,1.2)
  silkscreen extent -1,1.78 -0.9,1.88, body extent -0.9,-1.7 0.9,1.7, height 0.6
"4x 10k 1% - CAC-80P320X160-8M" [mm] "Chip Array, Concave, 8-Leads, Pitch 0.80mm,  Body 3.20x1.60mm,  IPC Low Density"
  oval 1.2x0.45 smd paste-99: 1(-0.95,1.2) 2(-0.95,0.4) 3(-0.95,-0.4) 4(-0.95,-1.2) 5(0.95,-1.2) 6(0.95,-0.4) 7(0.95,0.4) 8(0.95,1.2)
  silkscreen extent -1,1.78 -0.9,1.88, body extent -0.9,-1.7 0.9,1.7, height 0.6
"0603 CAPACITOR - CAPC1608X06N" [mm] "Chip Capacitor, 2-Leads, Body 1.60x0.80mm, IPC Medium Density"
  rrect50% 0.95x0.8 smd: 1(0,-0.85) 2(0,0.85)
  body extent -0.45,-0.85 0.45,0.85, height 0.6
"0603 capacitor - CAPC1608X06N" [mm] "Chip Capacitor, 2-Leads, Body 1.60x0.80mm, IPC Medium Density"
  rrect50% 0.95x0.8 smd: 1(0,-0.85) 2(0,0.85)
  body extent -0.45,-0.85 0.45,0.85, height 0.6
0805 [mm] "Chip Capacitor, 2-Leads, Body 2.0x1.3mm, IPC Medium Density"
  rrect50% 1.5x1 smd paste+0: 1(0,1.002) 2(0,-1.002)
  body extent -0.72,-1.1 0.72,1.1, height 0.8
"0805 - TALL" [mm] "Same as 0805 footprint, but solder mask is adjusted to leave more paste behind for tall (>0.9mm) components like big caps, which tend to be solder-starved on the regular footprint."
  rrect50% 1.6x1.1 smd paste+0: 1(0,1.052) 2(0,-1.052)
  body extent -0.72,-1.1 0.72,1.1, height 0.8
"AP7330-W5 - SOT95P270X145-5N" [mm] "SOT23, 5-Leads, Body 2.92x2.70mm, Pitch 0.95mm, IPC Medium Density"
  rrect80% 1x0.6 smd paste-0.04: 1(-1.35,0.95) 2(-1.35,0) 3(-1.35,-0.95) 4(1.35,-0.95) 5(1.35,0.95)
  silkscreen extent -1.48,-1.5 0.45,1.92, body extent -0.85,-1.52 0.85,1.52, height 1.45
"ATMXT1066TD-NHU - BGA117C65P13X9_950X700X65" [mm] "BGA, 117-Leads, Body 9.50x7.00mmx0.65mm, Pitch 0.65mm"
  round 0.25 smd paste-0.01 mask+0.04: A1(-3.9,2.6) A2(-3.25,2.6) A3(-2.6,2.6) A4(-1.95,2.6) A5(-1.3,2.6) A6(-0.65,2.6) A7(0,2.6) A8(0.65,2.6) A9(1.3,2.6) A10(1.95,2.6) A11(2.6,2.6) A12(3.25,2.6) A13(3.9,2.6) B1(-3.9,1.95) B2(-3.25,1.95) B3(-2.6,1.95) B4(-1.95,1.95) B5(-1.3,1.95) B6(-0.65,1.95) B7(0,1.95) B8(0.65,1.95) B9(1.3,1.95) B10(1.95,1.95) B11(2.6,1.95) B12(3.25,1.95) B13(3.9,1.95) C1(-3.9,1.3) C2(-3.25,1.3) C3(-2.6,1.3) C4(-1.95,1.3) C5(-1.3,1.3) C6(-0.65,1.3) C7(0,1.3) C8(0.65,1.3) C9(1.3,1.3) C10(1.95,1.3) C11(2.6,1.3) C12(3.25,1.3) C13(3.9,1.3) D1(-3.9,0.65) D2(-3.25,0.65) D3(-2.6,0.65) D4(-1.95,0.65) D5(-1.3,0.65) D6(-0.65,0.65) D7(0,0.65) D8(0.65,0.65) D9(1.3,0.65) D10(1.95,0.65) D11(2.6,0.65) D12(3.25,0.65) D13(3.9,0.65) E1(-3.9,0) E2(-3.25,0) E3(-2.6,0) E4(-1.95,0) E5(-1.3,0) E6(-0.65,0) E7(0,0) E8(0.65,0) E9(1.3,0) E10(1.95,0) E11(2.6,0) E12(3.25,0) E13(3.9,0) F1(-3.9,-0.65) F2(-3.25,-0.65) F3(-2.6,-0.65) F4(-1.95,-0.65) F5(-1.3,-0.65) F6(-0.65,-0.65) F7(0,-0.65) F8(0.65,-0.65) F9(1.3,-0.65) F10(1.95,-0.65) F11(2.6,-0.65) F12(3.25,-0.65) F13(3.9,-0.65) G1(-3.9,-1.3) G2(-3.25,-1.3) G3(-2.6,-1.3) G4(-1.95,-1.3) G5(-1.3,-1.3) G6(-0.65,-1.3) G7(0,-1.3) G8(0.65,-1.3) G9(1.3,-1.3) G10(1.95,-1.3) G11(2.6,-1.3) G12(3.25,-1.3) G13(3.9,-1.3) H1(-3.9,-1.95) H2(-3.25,-1.95) H3(-2.6,-1.95) H4(-1.95,-1.95) H5(-1.3,-1.95) H6(-0.65,-1.95) H7(0,-1.95) H8(0.65,-1.95) H9(1.3,-1.95) H10(1.95,-1.95) H11(2.6,-1.95) H12(3.25,-1.95) H13(3.9,-1.95) J1(-3.9,-2.6) J2(-3.25,-2.6) J3(-2.6,-2.6) J4(-1.95,-2.6) J5(-1.3,-2.6) J6(-0.65,-2.6) J7(0,-2.6) J8(0.65,-2.6) J9(1.3,-2.6) J10(1.95,-2.6) J11(2.6,-2.6) J12(3.25,-2.6) J13(3.9,-2.6)
  silkscreen extent -5.53,-3.5 4.75,3.5, body extent -4.75,-3.5 4.75,3.5, height 0.65
"Coordinate System" [mm]
  silkscreen extent 0,0 4.5,4.5
"CSD16301Q2 - SON65P200X80_HS-7M" [mm] "SON, 6-Leads, Body 2.00x2.00mm, Pitch 0.65mm, Thermal Pad 0.95x0.89mm, IPC Low Density"
  rrect80% 0.8x0.3 smd paste-99 mask+0.06: D(-1.145,0) D(-1.145,0.65) D(1.145,0) D(1.145,0.65) G(-1.145,-0.65) S(0.05,-0.65) S(1.145,-0.65)
  rrect30% 0.9x0.95 smd paste-99 mask+0.06: D(0,0.325)
  silkscreen extent -1.27,1.18 -1.17,1.27, body extent -1.05,-1.05 1.05,1.05, height 0.8
DX07S016JA1R1500 [mm] "USB-C (USB TYPE-C) USB 2.0 Receptacle Connector 24 (16+8 Dummy) Position Surface Mount, Right Angle; Through Hole"
  rrect70% 0.5x1 smd paste-0.04 mask+0.05: 1(-3.1,3) 2(-2.35,3) 11(2.35,3) 12(3.1,3)
  rrect70% 0.27x1 smd paste-0.02 mask+0.05: 3(-1.75,3) 4(-1.25,3) 5(-0.75,3) 6(-0.25,3) 7(0.25,3) 8(0.75,3) 9(1.25,3) 10(1.75,3)
  rrect100% 1.1x2.6 hole 0.6 slot 1.9 at 90 deg paste-99 mask+0.1: SHELL(-4.32,-1.2) SHELL(4.32,-1.2)
  rrect100% 1.1x2.1 hole 0.6 slot 1.6 at 90 deg paste-99 mask+0.1: SHELL(-4.32,2.625) SHELL(4.32,2.625)
  rrect60% 2x3.6 smd paste-0.12 mask+0.05: SHELL(-1.2,-0.9) SHELL(1.2,-0.9)
  round 0 hole 0.6: ""(-3,1.9)
  round 0 hole 0.6 slot 0.85 at 0 deg: ""(3,1.9)
  body extent -4.47,-3.65 4.47,3.25, height 3.18
FIDUCIAL-NEW [mm]
  Top Layer keep-out circle w0.6: c0,0 r0.2
FIDUCIAL_1.5 [mil]
  round 40 smd paste-60 mask+30: 1(0,0)
  Top Layer keep-out circle w21.65: c0,0 r41.34
MOTOR-VIBRATORY [mm]
  rrect50% 5.6x1.8 smd paste-99 mask+0.07: 1(2.3,1.4) 2(2.3,-0.8)
  body extent -8.5,-2.75 7,2.65, height 4.05
"PESD3V3S4UD - SOT95P275X110-6N" [mm] "SOT23, 6-Leads, Body 2.90x2.75mm, Pitch 0.95mm, IPC Medium Density"
  rrect80% 1.2x0.55 smd paste-0.03 mask+0.085: 1(-1.45,0.95) 2(-1.45,0) 3(-1.45,-0.95) 4(1.45,-0.95) 5(1.45,0) 6(1.45,0.95)
  silkscreen extent -1.63,1.78 -1.38,2.02, body extent -0.85,-1.55 0.85,1.55, height 1.1
RH100-12.000-16-3030 [mm] "3.2mm x 2.5mm crystal"
  rrect50% 1.4x1.1 smd paste-0.1: 1(-1.1,-0.9) 2(1.1,-0.9) 3(1.1,0.9) 4(-1.1,0.9)
  body extent -1.6,-1.25 1.6,1.25, height 1
"RP2040 - QFN40P700X700X90_HS-57M" [mm] "QFN, 56-Leads, Body 7.00x7.00mm, Pitch 0.40mm, Thermal Pad 3.10x3.10mm, IPC Low Density"
  oval 1x0.2 smd paste-99 mask+0.05: 1(-3.425,2.6) 2(-3.425,2.2) 3(-3.425,1.8) 4(-3.425,1.4) 5(-3.425,1) 6(-3.425,0.6) 7(-3.425,0.2) 8(-3.425,-0.2) 9(-3.425,-0.6) 10(-3.425,-1) 11(-3.425,-1.4) 12(-3.425,-1.8) 13(-3.425,-2.2) 14(-3.425,-2.6) 29(3.425,-2.6) 30(3.425,-2.2) 31(3.425,-1.8) 32(3.425,-1.4) 33(3.425,-1) 34(3.425,-0.6) 35(3.425,-0.2) 36(3.425,0.2) 37(3.425,0.6) 38(3.425,1) 39(3.425,1.4) 40(3.425,1.8) 41(3.425,2.2) 42(3.425,2.6)
  oval 0.2x1 smd paste-99 mask+0.05: 15(-2.6,-3.425) 16(-2.2,-3.425) 17(-1.8,-3.425) 18(-1.4,-3.425) 19(-1,-3.425) 20(-0.6,-3.425) 21(-0.2,-3.425) 22(0.2,-3.425) 23(0.6,-3.425) 24(1,-3.425) 25(1.4,-3.425) 26(1.8,-3.425) 27(2.2,-3.425) 28(2.6,-3.425) 43(2.6,3.425) 44(2.2,3.425) 45(1.8,3.425) 46(1.4,3.425) 47(1,3.425) 48(0.6,3.425) 49(0.2,3.425) 50(-0.2,3.425) 51(-0.6,3.425) 52(-1,3.425) 53(-1.4,3.425) 54(-1.8,3.425) 55(-2.2,3.425) 56(-2.6,3.425)
  rrect20% 3.3x3.3 smd paste-99: 57(0,0)
  silkscreen extent -4.42,-3.65 3.65,3.65, body extent -3.5,-3.5 3.5,3.5, height 0.9
SparkGap [mil]
  rect 40x40 smd rot 45 paste-99 mask+4: 1(0,0)
  rect 40x40 smd far side rot 45 paste-99 mask+4: 1(0,0)
SPMWH1228 [mm]
  rrect40% 1.3x2.2 smd paste-0.08 mask+0.02: 1(-1.25,0)
  rrect30% 2x2.2 smd paste-0.1 mask+0.02: 2(0.95,0)
  silkscreen extent 1.72,-1.67 2.3,-1.1, body extent -1.75,-1.4 1.75,1.4, height 0.65
"W25Q128JVS - SOIC127P790X216-8M" [mm] "SOIC, 8-Leads, Body 5.28x5.28mm, Pitch 1.27mm, IPC Low Density"
  oval 1.9x0.65 smd paste-0.05: 1(-3.65,1.905) 2(-3.65,0.635) 3(-3.65,-0.635) 4(-3.65,-1.905) 5(3.65,-1.905) 6(3.65,-0.635) 7(3.65,0.635) 8(3.65,1.905)
  silkscreen extent -3.05,-2.7 2.3,3.17, body extent -2.7,-2.7 2.7,2.7, height 2.16

## Part data
HFB.Q.1: "25-V N-Channel Power MOSFET, 20mOhm, 2nC Qg"
HFB.Ra.6: library part "Quad Res 1R 5% 1206", "Chip resistor"
HFB.U.6: "A sort of bargain basement miscellaneous kind of vibration motor that can be found on AliExpress. It has springs for connecting directly to a PCB."
MCH.FID.1 MCH.FID.2: library part FIDUCIAL_1.5, PNP-A=1, PNP-da=0, PNP-dx=0, PNP-dy=0, PNP-FeedType=Fiducial, PNP-Level=1, PNP-Lv=1, PNP-Nzl=2, PNP-PlacePriority=0, PNP-Pt=0, PNP-TapeIndex=0, PNP-TapeWidth=0, PNP-Thk=1.02, PNP-TS=70, PNP-Type=MARK1, PNP-Voff=0, PNP-W=0, PNP-X=4, PNP-Y=4
MCH.FID.3 MCH.FID.4: library part FIDUCIAL_NEW, "This fiducial is designed to work with OpenPNP. It presents a circular pattern under the solder mask, to prevent glare issues from messing with the detection.", PNP-A=1, PNP-da=0, PNP-dx=0, PNP-dy=0, PNP-FeedType=Fiducial, PNP-Level=1, PNP-Lv=1, PNP-Nzl=2, PNP-PlacePriority=0, PNP-Pt=0, PNP-TapeIndex=0, PNP-TapeWidth=0, PNP-Thk=1.02, PNP-TS=70, PNP-Type=MARK1, PNP-Voff=0, PNP-W=0, PNP-X=4, PNP-Y=4
MCH.LOGO.2: library part CoordinateSystem
MCH.SP.1 MCH.SP.2 MCH.SP.3 MCH.SP.4 MCH.SP.5 MCH.SP.6 MCH.SP.7 MCH.SP.8 MCH.SP.9 MCH.SP.10 MCH.SP.11 MCH.SP.12 MCH.SP.13 MCH.SP.14 MCH.SP.15 MCH.SP.16 MCH.SP.17 MCH.SP.18 MCH.SP.19 MCH.SP.20 MCH.SP.21 MCH.SP.22 MCH.SP.23 MCH.SP.24 MCH.SP.25 MCH.SP.26 MCH.SP.27 MCH.SP.28 MCH.SP.29 MCH.SP.30 MCH.SP.31 MCH.SP.32 MCH.SP.33 MCH.SP.34 MCH.SP.35 MCH.SP.36 MCH.SP.37 MCH.SP.38 MCH.SP.39 MCH.SP.40 MCH.SP.41 MCH.SP.42 MCH.SP.43 MCH.SP.44 MCH.SP.45 MCH.SP.46 MCH.SP.47 MCH.SP.48 MCH.SP.49 MCH.SP.50 MCH.SP.51 MCH.SP.52 MCH.SP.53 MCH.SP.54 MCH.SP.55 MCH.SP.56 MCH.SP.57 MCH.SP.58 MCH.SP.59 MCH.SP.60: "Open square pad for spark gapping", PNP-A=0, PNP-da=0, PNP-dx=0, PNP-dy=0, PNP-FeedType=Tape, PNP-Level=1, PNP-Lv=1, PNP-Nzl=2, PNP-PlacePriority=1, PNP-Pt=0, PNP-TapeIndex=1, PNP-TapeWidth=8, PNP-Thk=1, PNP-TS=70, PNP-Type=CHI, PNP-Voff=0, PNP-W=0, PNP-X=1, PNP-Y=1
MCU.C.1 MCU.C.3 MCU.C.4 MCU.C.5 MCU.C.6 MCU.C.7 MCU.C.8 MCU.C.22 MCU.C.24 TCN.C.14 TCN.C.15 TCN.C.16 TCN.C.17 TCN.C.20 TCN.C.26 TCN.C.29 TCN.C.32 TCN.C.34: library part "Cap 0.1uF 25V", "0603, X5R or better", Supplier Part Number 1=1276-6840-2-ND, Supplier 1=Digi-Key
MCU.C.2 MCU.C.21 REG.C.35 REG.C.36 TCN.C.18 TCN.C.28: library part "Cap 1uF 25V", "0805, X5R or better", Supplier Part Number 1=1276-1066-2-ND, Supplier 1=Digi-Key, Supplier 2=Digi-Key, Supplier Part Number 2=1276-1066-1-ND
  REG.C.35 REG.C.36: PNP-A=0, PNP-da=0, PNP-dx=0, PNP-dy=0, PNP-FeedType=Tape, PNP-Level=1, PNP-Lv=1, PNP-Nzl=2, PNP-PlacePriority=1, PNP-Pt=0, PNP-TapeIndex=1, PNP-TapeWidth=8, PNP-Thk=1.25, PNP-TS=70, PNP-Type=chi, PNP-Voff=0, PNP-W=0, PNP-X=2.00, PNP-Y=1.25
MCU.C.9 MCU.C.19: library part "Cap 18pF 50V", "0603, C0G or better", Supplier Part Number 1=1292-1494-1-ND, Supplier 1=Digi-Key
MCU.D.1: "3V/0.5W white LED, 2.8mm x 3.5mm", Supplier 1=Arrow, Supplier 2=Digi-Key, Supplier 3=Digi-Key, Supplier Part Number 2=1510-1428-1-ND, Supplier Part Number 3=1510-1429-1-ND
MCU.J.1: "2-pin 0.100\" header", Supplier Part Number 1=855-M20-9990245, Supplier 1=Mouser, Supplier 2=Digi-Key, Supplier Part Number 2=952-2261-ND
MCU.J.2: "3-pin 0.100\" header"
MCU.R.1 MCU.R.11: library part "Res 1k 1% 0805", "Chip resistor, 1/8W 100PPM", Supplier Part Number 1=RMCF0805FT1K00TR-ND, Supplier 1=Digi-Key
MCU.R.2: library part "Res 10k 1% 0805", "Chip resistor", Supplier Part Number 1=RMCF0805FT10K0TR-ND, Supplier 1=Digi-Key
MCU.R.5: library part "Res 100R 1% 0805", "Chip resistor", Supplier Part Number 1=RMCF0805FT100RCT-ND, Supplier 1=Digi-Key, Supplier 2=Digi-Key, Supplier Part Number 2=RMCF0805FT100RTR-ND
MCU.Ra.1 REG.Ra.3 USB.Ra.5: library part "Quad Res 10k 1% 1206", "Chip resistor"
MCU.U.1: Supplier Part Number 1=W25Q16JVSSIQ-ND, Supplier 1=Digi-Key
MCU.U.5: Supplier Part Number 1=49AJ8740, Supplier 1=Newark
MCU.Y.1: "12MHz Crystal 16pF 100 Ohms 4-SMD, No Lead (3.2mm x 2.5mm)", Supplier Part Number 1=XC2686CT-ND, Supplier 1=Digi-Key, Supplier 2=Mouser, Supplier Part Number 2=520-160-12-30B-AGMT
REG.C.13 TCN.C.12 TCN.C.23 TCN.C.31: library part "Cap 10uF 25V", "0805, X5R or better", Supplier Part Number 1=81-GRM21BR61E106KA3L, Supplier 1=Mouser, Supplier 2=Digi-Key, Supplier Part Number 2=490-5523-1-ND
  REG.C.13: PNP-A=0, PNP-da=0, PNP-dx=0, PNP-dy=0, PNP-FeedType=Tape, PNP-Level=1, PNP-Lv=1, PNP-Nzl=2, PNP-PlacePriority=1, PNP-Pt=0, PNP-TapeIndex=1, PNP-TapeWidth=8, PNP-Thk=1.25, PNP-TS=70, PNP-Type=chi, PNP-Voff=0, PNP-W=0, PNP-X=2.00, PNP-Y=1.25
REG.Ra.4 TCN.Ra.2: library part "Quad Res 1k 1% 1206", "Chip resistor"
REG.U.4: "300mA HIGH PSRR LOW NOISE LDO WITH ENABLE", Supplier Part Number 1=AP2202K-ADJTRG1DICT-ND, Supplier 1=Digi-Key, Supplier 2=Digi-Key, Supplier Part Number 2=576-1262-1-ND
TCN.C.10 TCN.C.11: library part "Cap 0.01uF 25V", "0603, X5R or better", Supplier Part Number 1=1276-6840-2-ND, Supplier 1=Digi-Key
TCN.U.2: "maXTouch 1066-node Touchscreen Controller"
USB.FB.1 USB.FB.2 USB.FB.3: "FERRITE BEAD 600 OHM 0805 1LN", Supplier Part Number 1=535-12556-1-ND, PNP-A=0, PNP-da=0, PNP-dx=0, PNP-dy=0, PNP-FeedType=Tape, PNP-Level=1, PNP-Lv=1, PNP-Nzl=2, PNP-PlacePriority=1, PNP-Pt=0, PNP-TapeIndex=1, PNP-TapeWidth=8, PNP-Thk=0.55, PNP-TS=70, PNP-Type=chi, PNP-Voff=0, PNP-W=0, PNP-X=2.00, PNP-Y=1.25, Supplier 1=Digi-Key
USB.J.3: "USB-C (USB TYPE-C) USB 2.0 Receptacle Connector 24 (16+8 Dummy) Position Surface Mount, Right Angle; Through Hole", Supplier Part Number 1=670-DX07S016JA1R1500CT-ND, Supplier 1=Digi-Key, Supplier 2=Mouser, Supplier Part Number 2=656-DX07S016JA1R1500
USB.R.3 USB.R.4: library part "Res 22R 1% 0805", "Chip resistor", Supplier Part Number 1=RMCF0805FT22R0CT-ND, PNP-A=0, PNP-da=0, PNP-dx=0, PNP-dy=0, PNP-FeedType=Tape, PNP-Level=1, PNP-Lv=1, PNP-Nzl=2, PNP-PlacePriority=1, PNP-Pt=0, PNP-TapeIndex=1, PNP-TapeWidth=8, PNP-Thk=0.55, PNP-TS=70, PNP-Type=chi, PNP-Voff=0, PNP-W=0, PNP-X=2.00, PNP-Y=1.25, Supplier 1=Digi-Key, Supplier 2=Arrow, Supplier Part Number 2=RMCF0805FT22R0
USB.Z.1: "TVS DIODE 5.5V 6TSOP (Low capacitance, USB)", PNP-A=270, PNP-da=0, PNP-dx=0, PNP-dy=0, PNP-FeedType=Tape, PNP-Level=1, PNP-Lv=26, PNP-Nzl=2, PNP-PlacePriority=3, PNP-Pt=0, PNP-TapeIndex=1, PNP-TapeWidth=8, PNP-Thk=1, PNP-TS=90, PNP-Type=CHP, PNP-Voff=0, PNP-W=0, PNP-X=2.9, PNP-Y=1.3

## Free pads (board coordinates)
  round 3.8 hole 3: 4(-1,10) 4(86,14)

## Via types
v1: diameter 0.8, hole 0.4, Top Layer to Bottom Layer, tented both sides, 1109 vias
v2: diameter 0.4, hole 0.2, Top Layer to Bottom Layer, tented both sides, 131 vias
v3: diameter 0.55, hole 0.3, Top Layer to Bottom Layer, tented both sides, 97 vias
v4: diameter 0.25, hole 0.15, Top Layer to Bottom Layer, tented both sides, 74 vias
v5: diameter 1.016, hole 0.508, Top Layer to Bottom Layer, tented both sides, 60 vias
v6: diameter 0.45, hole 0.3, Top Layer to Bottom Layer, tented both sides, 37 vias
v7: diameter 0.35, hole 0.2, Top Layer to Bottom Layer, tented both sides, 31 vias
v8: diameter 0.7, hole 0.4, Top Layer to Bottom Layer, tented both sides, 22 vias
v9: diameter 0.6, hole 0.3, Top Layer to Bottom Layer, tented both sides, 3 vias
v10: diameter 0.7, hole 0.3, Top Layer to Bottom Layer, tented both sides, 2 vias

## Nets (pads, with @x,y where several pads share a name; then routed paths per layer and width w, separated by ;. In a path a pad name is that pad's centre, name@x,y a point inside that pad or via, vN(x,y) a via of type N, cw(c..) or ccw(c..) an arc to the next point about the centre after c; other vN are vias at no path point)
1V1: MCU.C.21.2 MCU.C.22.2 MCU.C.24.2 MCU.U.5.23 MCU.U.5.45 MCU.U.5.50 | length 20.5
  Top Layer w0.2: v6(48.852,12.8) 48.902,12.85 MCU.U.5.45@50.7,12.85 ; v6(49,9.9) 49.95,10.85 MCU.U.5.50@50.7,10.85 ; MCU.U.5.23@57.55,11.65 58.759,11.65 ccw(c58.759,11.991) MCU.C.22.2@59,11.75
  Top Layer w0.4: v6(48.852,12.8) 48.852,12.502 48.2,11.85 48.2,10.7 v6(49,9.9)
  Inner 1 w0.4: v6(48.852,12.8) 49.877,13.825 56.675,13.825 v6(59,11.5)
3V3: MCU.C.1.2 MCU.C.2.2 MCU.C.3.2 MCU.C.4.2 MCU.C.5.2 MCU.C.6.2 MCU.C.7.2 MCU.C.8.2 MCU.R.2.1 MCU.Ra.1.5 MCU.Ra.1.6 MCU.U.1.8 MCU.U.5.1 MCU.U.5.10 MCU.U.5.22 MCU.U.5.26 MCU.U.5.33 MCU.U.5.42 MCU.U.5.43 MCU.U.5.44 MCU.U.5.48 MCU.U.5.49 REG.C.13.2 REG.C.36.2 REG.Ra.3.3 REG.Ra.3.4 REG.U.4.5 TCN.C.17.2 TCN.C.18.2 TCN.C.20.2 TCN.C.23.2 TCN.C.26.2 TCN.C.28.2 TCN.C.29.2 TCN.C.34.2 TCN.Ra.2.6 TCN.Ra.2.7 TCN.Ra.2.8 TCN.U.2.A11 TCN.U.2.D4 TCN.U.2.E4 TCN.U.2.E7 TCN.U.2.E9 TCN.U.2.F4 | length 19.4
  Top Layer w0.2: v6(49.05,11.2) MCU.C.7.2@49.1,11.25 ; MCU.U.5.49@50.7,11.25 MCU.C.7.2@49.1,11.25 ; MCU.U.5.48@50.7,11.65 49.5,11.65 MCU.C.7.2@49.1,11.25 ; v6(50.95,6.5) 51.525,7.075 MCU.U.5.1@51.525,7.625 ; v6(54.875,5.95) ccw(c54.815,6.01) MCU.C.4.2@54.9,6.01 ; MCU.C.4.2@55.125,6.01 MCU.U.5.10@55.125,7.625 ; MCU.U.5.33@55.125,14.475 55.125,15.84 cw(c55.21,15.84) v6(55.15,15.9) ; v2(56.45,11.25) MCU.U.5.22@57.55,11.25 ; MCU.U.5.26@57.55,12.85 v6(59,12.85)
  Top Layer w0.6: v6(39,15.55) MCU.U.1.8@40.795,15.55
  Top Layer w0.8: v8(16.65,7.85) 16.9,7.6 v8(18.2,7.6)
  Top Layer w0.9: v8(18.2,7.6) 18.202,7.598 v8(20.15,7.598)
  Inner 3 w0.4: v7(21.3,14.525) v7(22.1,14.525) v7(22.9,14.525)
  Inner 3 w0.9: 13.725,2.75 13.725,2.363 ccw(c15.688,2.363) v9(14.3,0.975)
  other v4: 8.35,3.9 12.9,5.85 9.65,6.5 10.95,6.5 12.9,6.5 12.9,7.15
  other v6: 46.725,6.2 48.95,14.4 40.8,14.95 50.798,16.2
  other v7: 57.785,4.694 58.585,4.694 25.125,14.2 32.3,14.45 33.05,14.45 25.125,15 32.3,15.15 33.05,15.15
  other v8: 8.277,0.7 3.725,5.948 5.275,6.1 10.35,10.725 32.552,12.4 34.048,12.6
DrivenShield: TCN.U.2.J2 | length 680.6
  Inner 3 w0.3: v2(10.7,-103.75) 16.568,-103.75
  Inner 2 w0.3: -65.501,-3.401 -64.5,-2.4 -56.35,-2.4 -55.7,-1.75 -48.6,-1.75 -47.975,-1.125 -42.225,-1.125 -41.725,-0.625 -8.6,-0.625 -7.45,0.525 -0.3,0.525 1.465,2.29 ; 2.512,3.013 2.512,3.488 2,4 -0.8,4 -1.825,2.975 -8.7,2.975 -9.875,1.8 -49.25,1.8 -50.15,0.9 -57.2,0.9 -59.3,3 -64.5,3 -69.85,-2.35 -69.85,-81.675 -69.5,-82.025 -69.5,-85.325 -69.275,-85.55 -69.275,-89.075 -69.05,-89.3 -69.05,-92.675 -68.85,-92.875 -68.85,-96.4 -68.525,-96.725 -68.525,-100.125 -67.975,-100.675 -67.975,-102.825 -67.05,-103.75 v2(10.7,-103.75) ; 7.103,-2.125 19.575,-2.125 20.875,-0.825 ; 11.452,-103.75 89.175,-103.75 89.9,-103.025 89.9,-51.775 90.525,-51.15 90.525,-47.4 90.75,-47.175 90.75,-43.725 90.95,-43.525 90.95,-40.275 91.275,-39.95 91.275,-36.3 91.5,-36.075 91.5,-32.6 91.7,-32.4 91.7,-28.975 92.075,-28.6 92.075,-0.525 90.131,1.419 84.819,1.419 83.575,0.175 65.8,0.175 65.325,0.65 49.95,0.65 49.325,1.275 35.275,1.275 35,1.55 26.95,1.55 24.8,3.7 22.45,3.7 21.7,2.95 v2(21.7,2.825) v2@21.7,2.8 ; 22.67,1.475 23.325,1.475 25.7,-0.9 33.45,-0.9 33.7,-1.15 48.125,-1.15 48.825,-1.85 64.075,-1.85 64.575,-2.35 87.15,-2.35 88.2,-3.4
  Bottom Layer w0.3: v4(14.2,9.1) 20.475,2.825 v2(21.7,2.825)
GND: HFB.Q.1.S MCH.SP.1.1 MCH.SP.2.1 MCH.SP.3.1 MCH.SP.4.1 MCH.SP.5.1 MCH.SP.6.1 MCH.SP.7.1 MCH.SP.8.1 MCH.SP.9.1 MCH.SP.10.1 MCH.SP.11.1 MCH.SP.12.1 MCH.SP.13.1 MCH.SP.14.1 MCH.SP.15.1 MCH.SP.16.1 MCH.SP.17.1 MCH.SP.18.1 MCH.SP.19.1 MCH.SP.20.1 MCH.SP.21.1 MCH.SP.22.1 MCH.SP.23.1 MCH.SP.24.1 MCH.SP.25.1 MCH.SP.26.1 MCH.SP.27.1 MCH.SP.28.1 MCH.SP.29.1 MCH.SP.30.1 MCH.SP.31.1 MCH.SP.32.1 MCH.SP.33.1 MCH.SP.34.1 MCH.SP.35.1 MCH.SP.36.1 MCH.SP.37.1 MCH.SP.38.1 MCH.SP.39.1 MCH.SP.40.1 MCH.SP.41.1 MCH.SP.42.1 MCH.SP.43.1 MCH.SP.44.1 MCH.SP.45.1 MCH.SP.46.1 MCH.SP.47.1 MCH.SP.48.1 MCH.SP.49.1 MCH.SP.50.1 MCH.SP.51.1 MCH.SP.52.1 MCH.SP.53.1 MCH.SP.54.1 MCH.SP.55.1 MCH.SP.56.1 MCH.SP.57.1 MCH.SP.58.1 MCH.SP.59.1 MCH.SP.60.1 MCU.C.1.1 MCU.C.2.1 MCU.C.3.1 MCU.C.4.1 MCU.C.5.1 MCU.C.6.1 MCU.C.7.1 MCU.C.8.1 MCU.C.9.2 MCU.C.19.1 MCU.C.21.1 MCU.C.22.1 MCU.C.24.1 MCU.J.1.1 MCU.J.2.3 MCU.R.5.1 MCU.Ra.1.2 MCU.Ra.1.7 MCU.Ra.1.8 MCU.U.1.4 MCU.U.5.5 MCU.U.5.9 MCU.U.5.13 MCU.U.5.16 MCU.U.5.17 MCU.U.5.19 MCU.U.5.27 MCU.U.5.28 MCU.U.5.29 MCU.U.5.30 MCU.U.5.31 MCU.U.5.32 MCU.U.5.34 MCU.U.5.35 MCU.U.5.37 MCU.U.5.38 MCU.U.5.39 MCU.U.5.40 MCU.U.5.41 MCU.U.5.57 MCU.Y.1.2 MCU.Y.1.4 pad.4 REG.C.13.1 REG.C.35.1 REG.C.36.1 REG.Ra.3.1 REG.Ra.3.2 REG.Ra.3.8 REG.Ra.4.1 REG.Ra.4.7 REG.Ra.4.8 REG.U.4.2 TCN.C.12.1 TCN.C.14.1 TCN.C.15.1 TCN.C.16.1 TCN.C.17.1 TCN.C.18.1 TCN.C.20.1 TCN.C.23.1 TCN.C.26.1 TCN.C.28.1 TCN.C.29.1 TCN.C.31.1 TCN.C.32.1 TCN.C.34.1 TCN.Ra.2.4 TCN.Ra.2.5 TCN.U.2.B3 TCN.U.2.B11 TCN.U.2.C3 TCN.U.2.D10 TCN.U.2.E5 TCN.U.2.E8 TCN.U.2.G5 TCN.U.2.G7 TCN.U.2.H7 TCN.U.2.H8 TCN.U.2.J6 TCN.U.2.J7 USB.J.3.1 USB.J.3.12 USB.J.3.SHELL USB.Ra.5.1 USB.Ra.5.2 USB.Ra.5.3 USB.Ra.5.4 USB.Z.1.2 | length 811.2
  Top Layer w0.2: MCU.U.5.5@53.125,7.625 53.125,10.05 v6(54.125,11.05) 54.725,10.45 MCU.U.5.9@54.725,7.625 ; v6(55.425,9.75) 55.425,9.375 56.325,8.475 MCU.U.5.13@56.325,7.625 ; MCU.U.5.19@57.55,10.05 MCU.C.22.1@59,10.05
  Top Layer w0.25: v4(10.95,8.45) TCN.U.2.J7@10.95,9.1 v4(11.6,9.1)
  Top Layer w0.55: v3@76.5,10.3 USB.Z.1.2@77.325,10.3
  Top Layer w1.1: -73.1,-98 ccw(c-66,-98) MCH.SP.18.1@-66,-105.1 ; MCH.SP.18.1@-66,-105 ccw(c-65.759,-104.759) -65.759,-105.1 8.75,-105.1 ; TCN.C.17.1@6.575,0.7 TCN.C.16.1@6.575,2.2 ; v10@10.275,-105.1 MCH.SP.42.1@83.759,-105.1 ; MCH.SP.42.1@83.759,-105.025 ccw(c83.759,-104.684) v5(84,-104.925) ccw(c84.1,-104.925) MCH.SP.42.1@84.1,-105.025 ; MCH.SP.42.1@84.1,-105.1 88,-105.1 ccw(c88,-98) 95.1,-98 95.1,-0.082 ccw(c90.839,-0.082) 90.019,4.099 v2(89,4) v5(85.5,4)
  Inner 3 w1.1: v5@13.9,-105.025 ccw(c13.9,-104.925) v5(14,-104.925)
  Inner 2 w0.25: v4(13.55,5.2) 13.875,4.875
  Inner 2 w0.6: v8(11.75,-0.177) v8@11.75,-0.05 ; 14.302,4.698 ccw(c13.875,4.271) 13.875,4.875 14.681,4.069 cw(c12.885,2.273) 15.425,2.273 v9(15.425,2.225) ; 14.427,4.907 ccw(c14.85,5.2) 14.724,4.701 15.256,4.169 cw(c13.46,2.373) 16,2.373 v9(16,0.975) 15.902,1.073 cw(c17.055,2.225) v9(15.425,2.225) ; v8@11.75,-0.05 11.75,0.75 13.55,2.55 v4(13.55,4.55) 13.988,4.113 ; v8@11.75,-0.05 13.988,2.188 13.988,4.113 ; 13.988,4.113 15.107,2.993 cw(c14.339,2.225) v9(15.425,2.225)
  Inner 2 w1.1: -73.1,-98 ccw(c-66,-98) v5@-66,-105.1 ; v5@-65.759,-105.1 8.75,-105.1 ; v8(6.6,2.225) 6.6,3.325 7.775,4.5 ; v10@10.275,-105.1 v5@83.759,-105.1 ; v5@84.1,-105.1 88,-105.1 ccw(c88,-98) 95.1,-98
  Inner 1 w1.1: 5.6,-105.1 v5@13.9,-105.1
  Bottom Layer w1.1: -73.1,-98 ccw(c-66,-98) MCH.SP.18.1@-66,-105.1 ; v5(-66,-104.925) ccw(c-65.759,-104.684) MCH.SP.18.1@-65.759,-105.025 ; MCH.SP.18.1@-65.759,-105.1 8.75,-105.1 ; MCH.SP.24.1@-16,13.1 v3(1.3,13.1) ; v10@10.275,-105.1 MCH.SP.42.1@83.759,-105.1 ; MCH.SP.42.1@83.759,-105.025 ccw(c83.759,-104.684) v5(84,-104.925) ccw(c84.1,-104.925) MCH.SP.42.1@84.1,-105.025 ; MCH.SP.42.1@84.1,-105.1 88,-105.1 ccw(c88,-98) 95.1,-98 95.1,-0.082 ccw(c90.839,-0.082) 90.061,4.107 cw(c89.863,5.189) 89.972,4.094 89.969,4.094 v2(89,4) v5(85.5,4)
  other v2: 76.5,3 40.7,3.375 92,4 40,6 87.9,6.2 74.6,6.5 69.9,6.575 36.15,6.75 54.675,6.8 91.2,7.3 29.5,7.8 73.6,8.3 76.8,8.7 83,9 29.4,9.1 22.1,9.4 26.1,9.4 88.5,9.4 32.3,9.7 68,10 45.4,10.9 64.1,11 84,11 43.6,11.8 19.4,12 66.5,12 82.5,12.3 62.1,12.7 64.1,12.7 54.3,13.3 24.4,13.5 45.2,13.5 58.5,13.7 39,14 41.5,14 16.55,14.125 94.7,14.6 45.45,15 81.9,15.1 36.2,15.4 37.2,15.4 66,16 67.95,16.025 68.75,16.025 69.55,16.025 26.4,16.2 46.6,16.3 18,16.5 30,17 48.9,17 89.8,17.3 62,17.5 65,17.5 68,17.5 26.5,18 33,18 42,18 57,18 49.2,18.1 52.9,18.1 82.4,18.3
  other v3: -70.575,-103.5 -72,-101.825 -72.85,-99.85 -70.475,-98.2 -71,1 -69,3 73.5,3 75,3 78,3 50,3.5 53,3.5 -55,4 -52,4 56,4 62,4 65,4 84,4 37,4.5 -67,5 -56.5,5 -50.5,5 -49,5 -46,5 -43,5 -40,5 -37,5 -34,5 -31,5 -28,5 -25,5 -22,5 -19,5 -16,5 -13,5 29,5 32,5 35,5 -64,6 -61,6 -58,6 -10,6 -7,6 -4,6 -1,6 20,6 23,6 26,6 1,8 44.6,8.85 -5.5,9.85 60.8,10.2 76.6,10.3 3,11 39.8,11.8 15.525,12.55 -11,13 63.8,14.7 13,15 19,15 75.5,15.5 77.5,15.5 21,16.5 75,18 78,18
  other v4: 8.35,4.55 9,5.85 10.3,6.5 12.25,6.5 10.95,7.8 12.25,7.8 10.3,8.45
  other v5: -56,-104.925 -46,-104.925 -36,-104.925 -26,-104.925 -16,-104.925 -6,-104.925 4,-104.925 24,-104.925 34,-104.925 44,-104.925 54,-104.925 64,-104.925 74,-104.925 -72.8,-96 94.8,-96 -72.8,-86 94.8,-86 -72.8,-76 94.8,-76 -72.8,-66 94.8,-66 -72.8,-56 94.8,-56 -72.8,-46 94.8,-46 -72.8,-36 94.8,-36 -72.8,-26 94.8,-26 -72.8,-16 94.8,-16 -72.8,-6 94.8,-6 71.5,3 51.5,3.5 63.5,3.5 -72.8,4 38.5,4 94.5,4 30.5,5 21.5,6 3.5,12.5 -66,12.8 -57,12.8 -48,12.8 -35,12.8 -26,12.8 -16,12.8 -6,12.8 94,17 24,17.5 39,17.5 45.5,17.5 58.5,17.5 70,17.5 83.5,17.5
  other v6: 54.875,4.25 49.25,6.5 54.1,9.7 52.825,9.75 59,9.8 47.3,9.9 63.5,10.3 77.975,10.3 47.35,11.2 63.2,11.8 46.5,12.3 52.825,12.35 55.425,12.35 54.1,12.4 47,13.3 61,13.6 47.25,14.4 59,14.55 52.65,15.7 56.85,15.9 53.15,16.7 61.104,16.856
  other v7: 59.385,3.944 60.185,3.944 59.385,6.594 23.7,14.525 35.075,15.4 25.15,15.8 31.275,15.8 25.125,16.6 27.025,16.6
  other v8: 5.275,7.8 3.725,8.052 16.65,9.55 18.2,9.7 20.15,9.702 5.623,11.2 9.05,12.4 30.548,12.4 10.35,12.425 36.052,12.6 36.95,16.402
  other v10: 10.3,-105.1
NetHFB.Q.1_D: HFB.Q.1.D HFB.U.6.2 | length 25.4
  Top Layer w0.3: HFB.Q.1.D@75.18,4.693 75.54,4.693 ccw(c75.54,5.803) HFB.Q.1.D@76.325,5.018 ; HFB.Q.1.D@75.18,5.343 75.54,5.343 cw(c75.54,4.233) HFB.Q.1.D@76.325,5.018 ; HFB.Q.1.D@77.47,4.693 77.11,4.693 cw(c77.11,5.803) HFB.Q.1.D@76.325,5.018 ; HFB.Q.1.D@77.47,5.343 77.11,5.343 ccw(c77.11,4.233) HFB.Q.1.D@76.325,5.018
  Top Layer w0.9: HFB.Q.1.D@76.325,5.018 v10@76.325,5.827
  Inner 1 w0.9: v10(76.325,5.825) 81.575,5.825 v2(90.95,15.2) ; v2@90.975,15.2 v2(91.775,16)
NetHFB.Q.1_G: HFB.Q.1.G MCU.Ra.1.1 MCU.U.5.18 | length 22.9
  Top Layer w0.2: MCU.U.5.18@57.55,9.65 58.075,9.65 59.25,8.475 ; v2(60.075,8.475) 59.25,8.475 ; MCU.Ra.1.1@60.185,6.219 60.185,7.54 59.25,8.475 ; v2(73.65,5.55) 73.65,5.075 74.675,4.05 HFB.Q.1.G@75.18,4.05
  Inner 1 w0.2: v2(60.075,8.475) 70.725,8.475 v2(73.65,5.55)
NetHFB.Ra.6_1: HFB.Ra.6.1 REG.C.35.2 REG.U.4.1 REG.U.4.3 USB.FB.1.2 | length 48.5
  Top Layer w0.4: REG.U.4.3@35.3,16.35 REG.U.4.3@35.3,16.576 ; REG.C.35.2@36.934,14.398 REG.C.35.2@36.95,14.398
  Top Layer w0.45: USB.FB.1.2@72,9.198 72.585,8.612 cw(c72.248,8.275) 72.725,8.275 HFB.Ra.6.1@72.725,7.525
  Top Layer w0.6: REG.U.4.3@35.3,16.35 35.004,16.35 ccw(c35.004,15.496) 34.4,16.1 ccw(c34.883,15.617) 34.2,15.617 34.2,15.183 ccw(c34.883,15.183) 34.4,14.7 ccw(c35.004,15.304) 35.004,14.45 REG.U.4.1@35.3,14.45 36.898,14.45 REG.C.35.2@36.95,14.398
  Top Layer w0.8: REG.U.4.3@35.3,16.576 cw(c36.324,16.576) v1(35.6,17.3) ; v1(70.5,10.25) 70.948,10.25 USB.FB.1.2@72,9.198
  Inner 1 w0.8: v1(35.6,17.3) 37.45,17.3 38.3,16.45 45.025,16.45 46.025,15.45 49.8,15.45 50.7,14.55 57.425,14.55 58.2,15.325 61.325,15.325 62.925,13.725 66.375,13.725 69.85,10.25 v1(70.5,10.25)